# Altium PCB PROC091F_ASCII.PcbDoc (part 1 of 7)
Units mil, origin at the board's own origin, x right, y up, seen from the top; angles counter-clockwise.
Board outline 3590.95 x 906.17 mil, 8 copper layers (Top Layer, GND1, Sig1, PWR1, PWR2, Sig2, GND2, Bottom Layer), stack 63.146 mil thick; 420 components, 316 nets, 1432 pads, 774 vias.
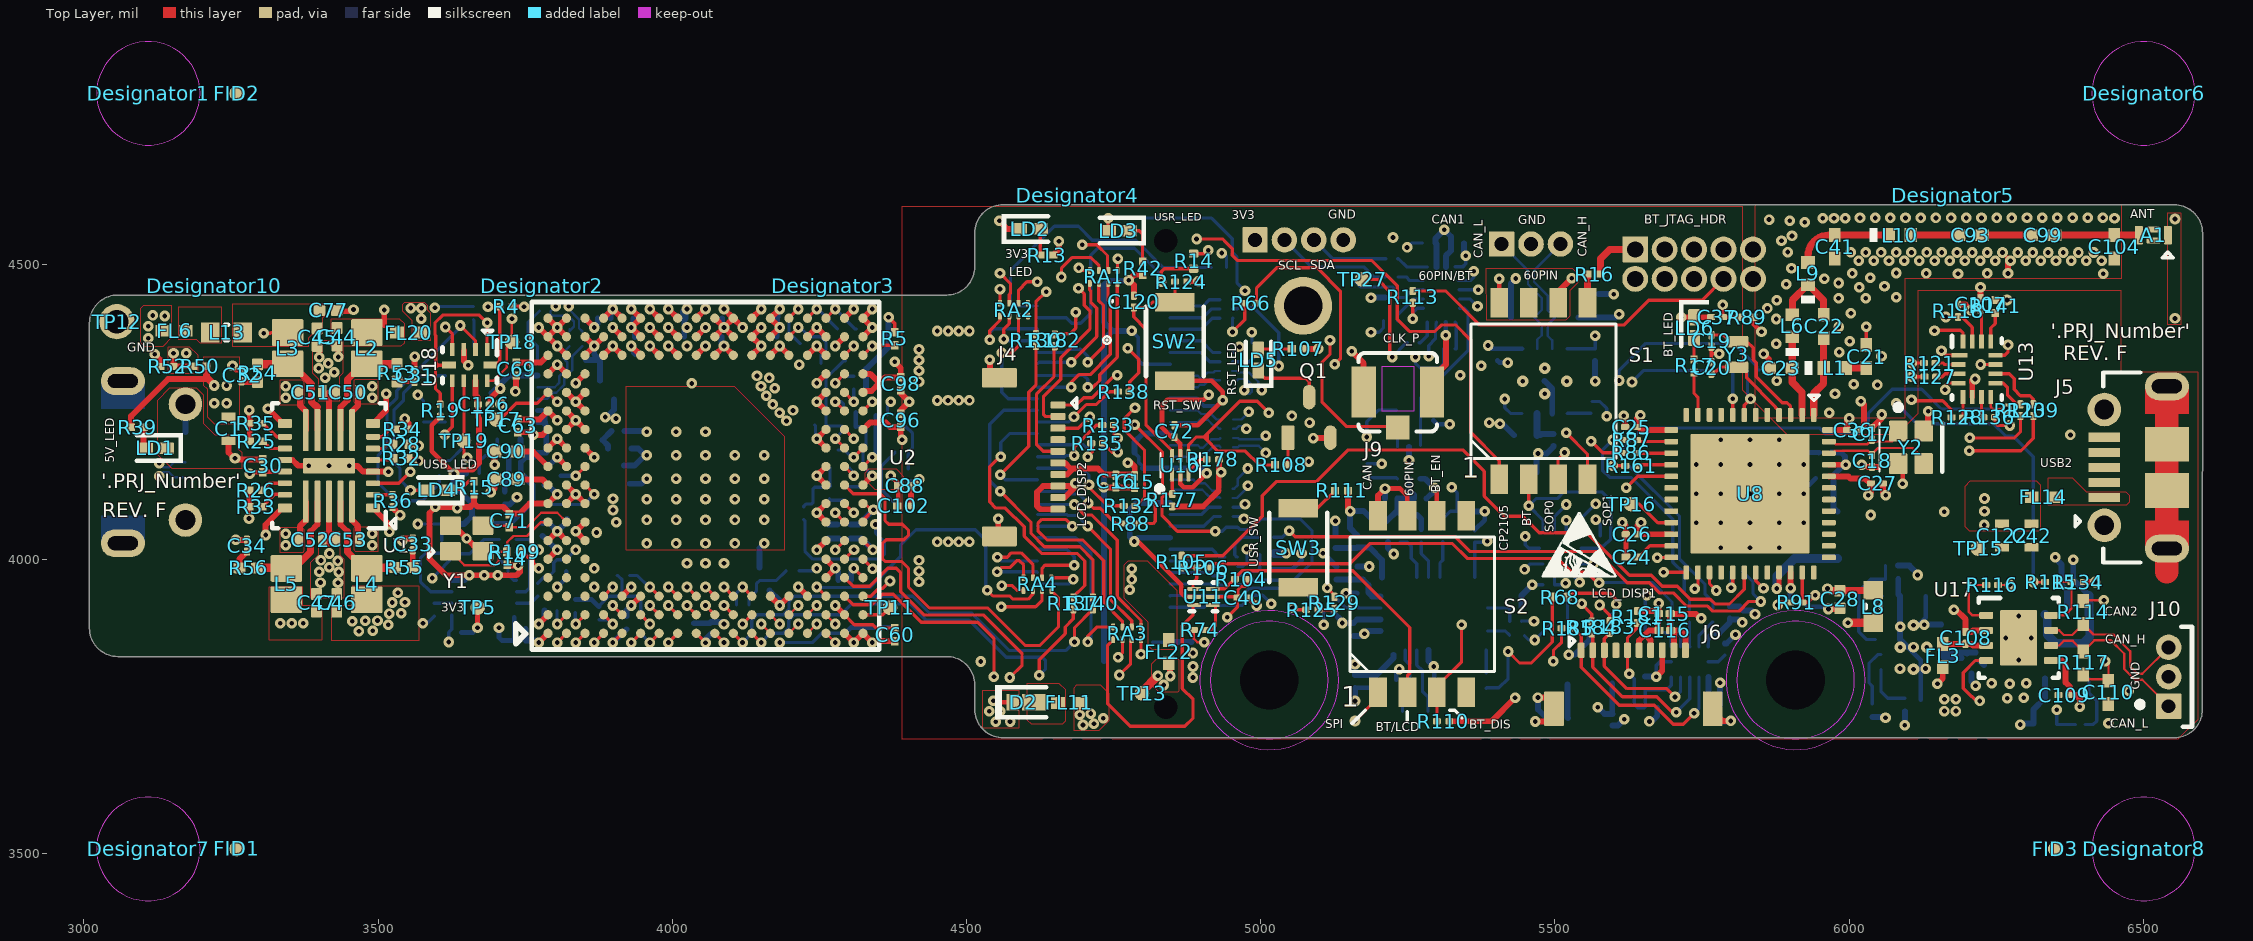
[diagram p0: Top Layer view]
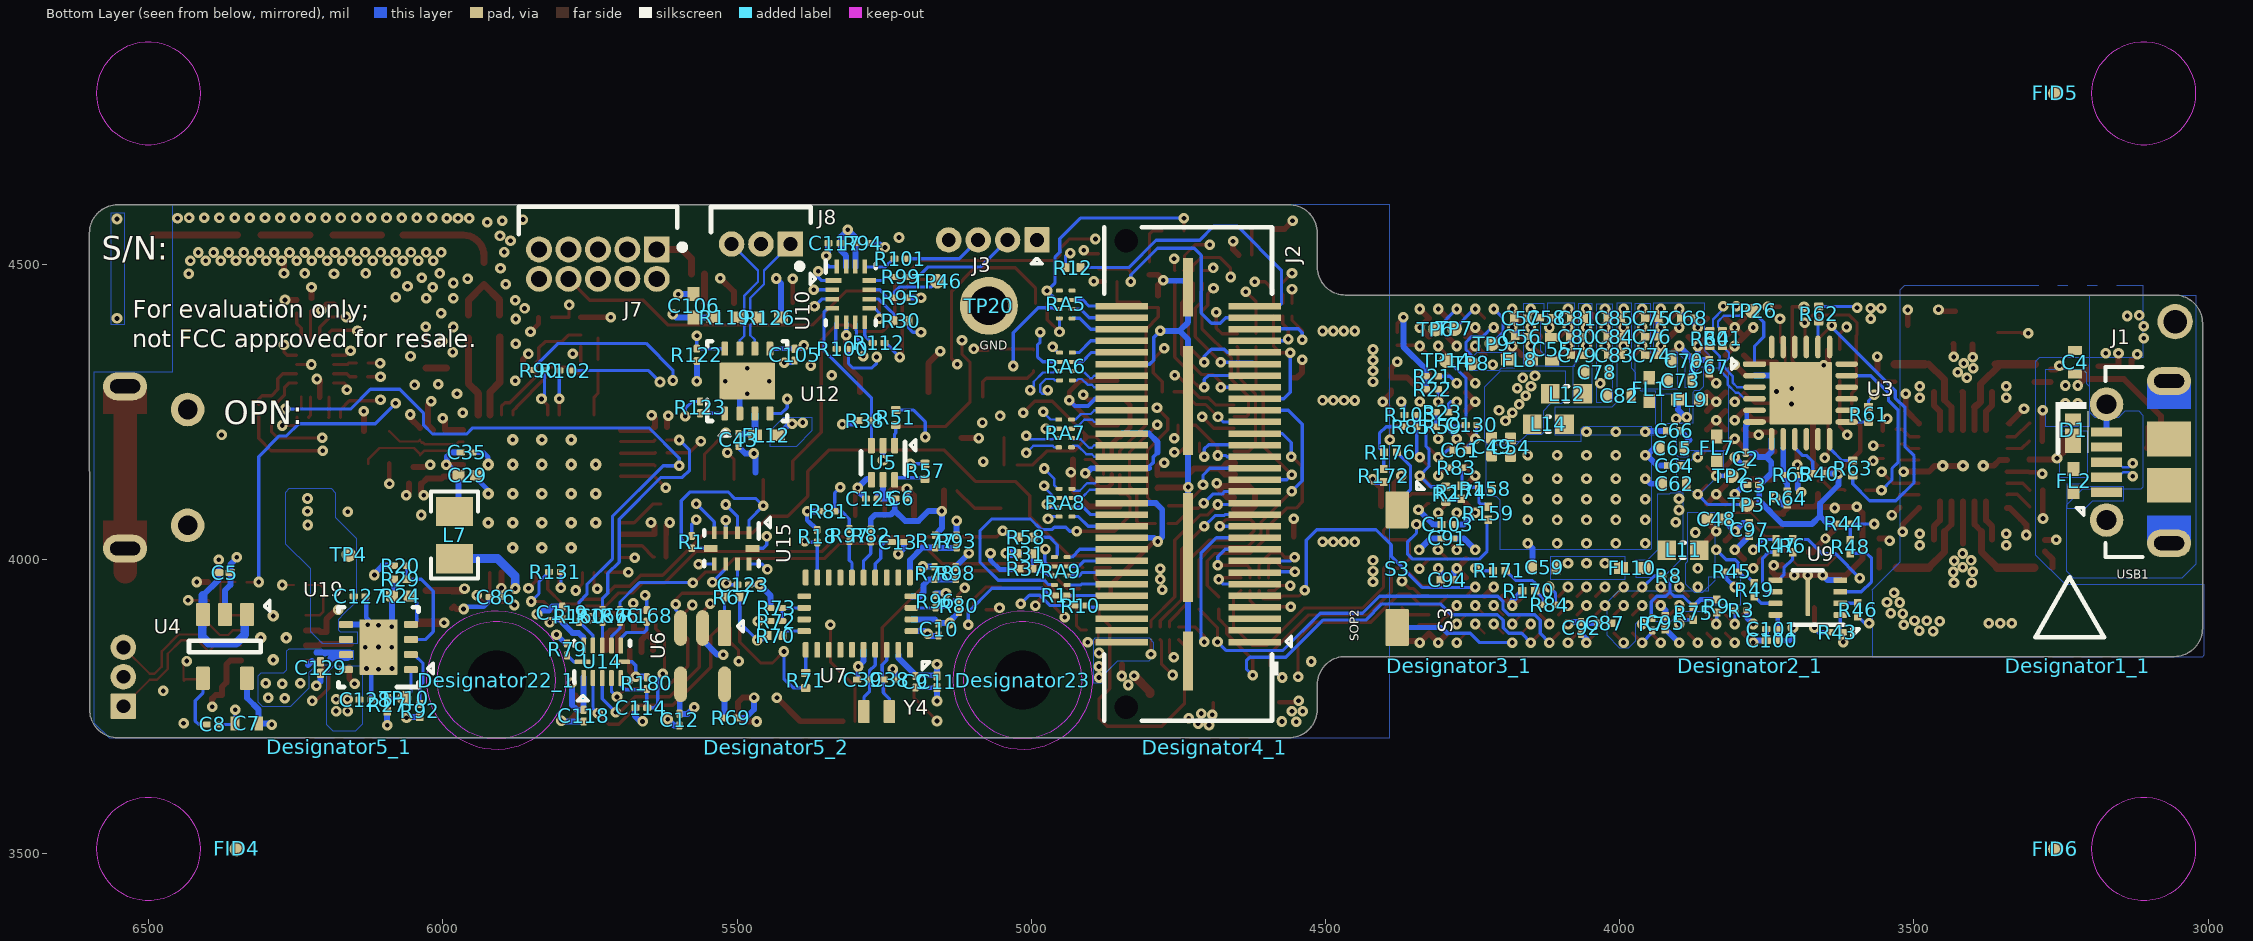
[diagram p1: Bottom Layer view, seen from below]
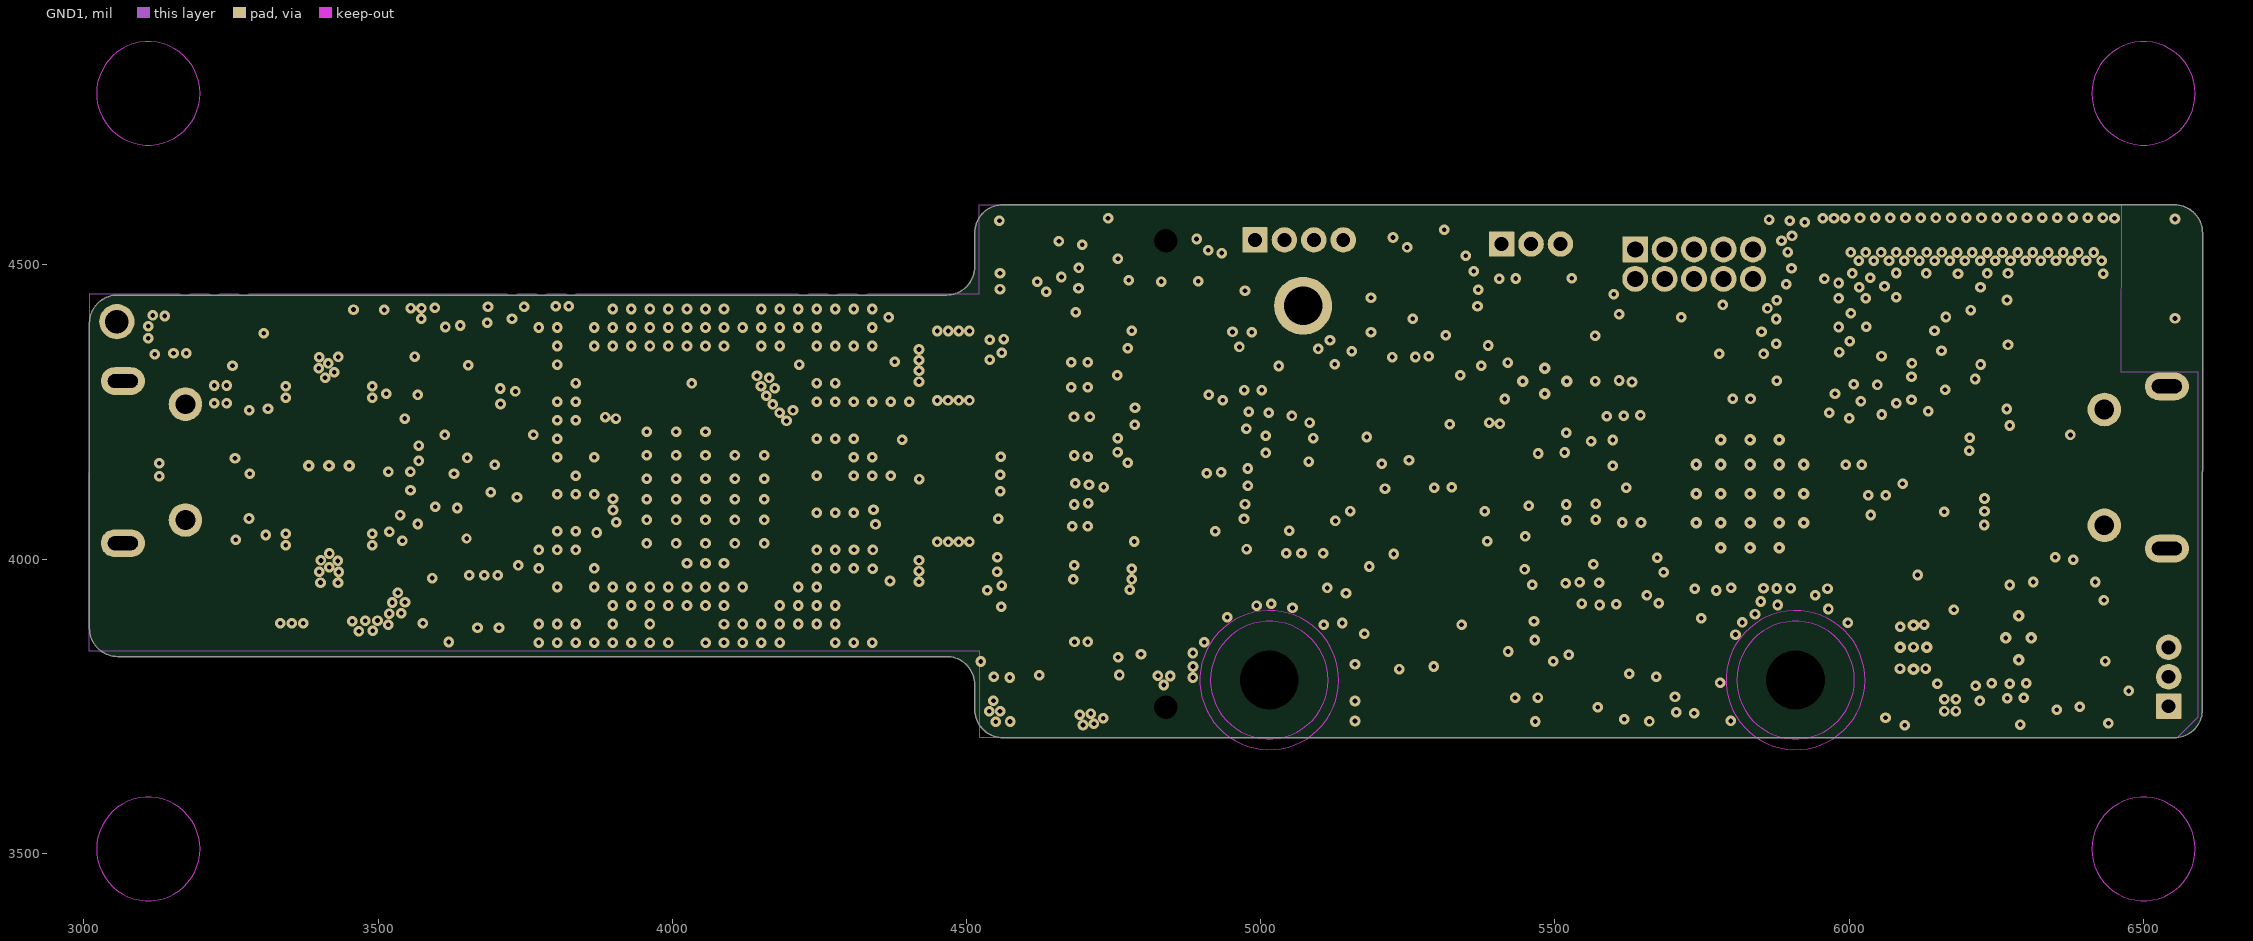
[diagram p2: GND1]
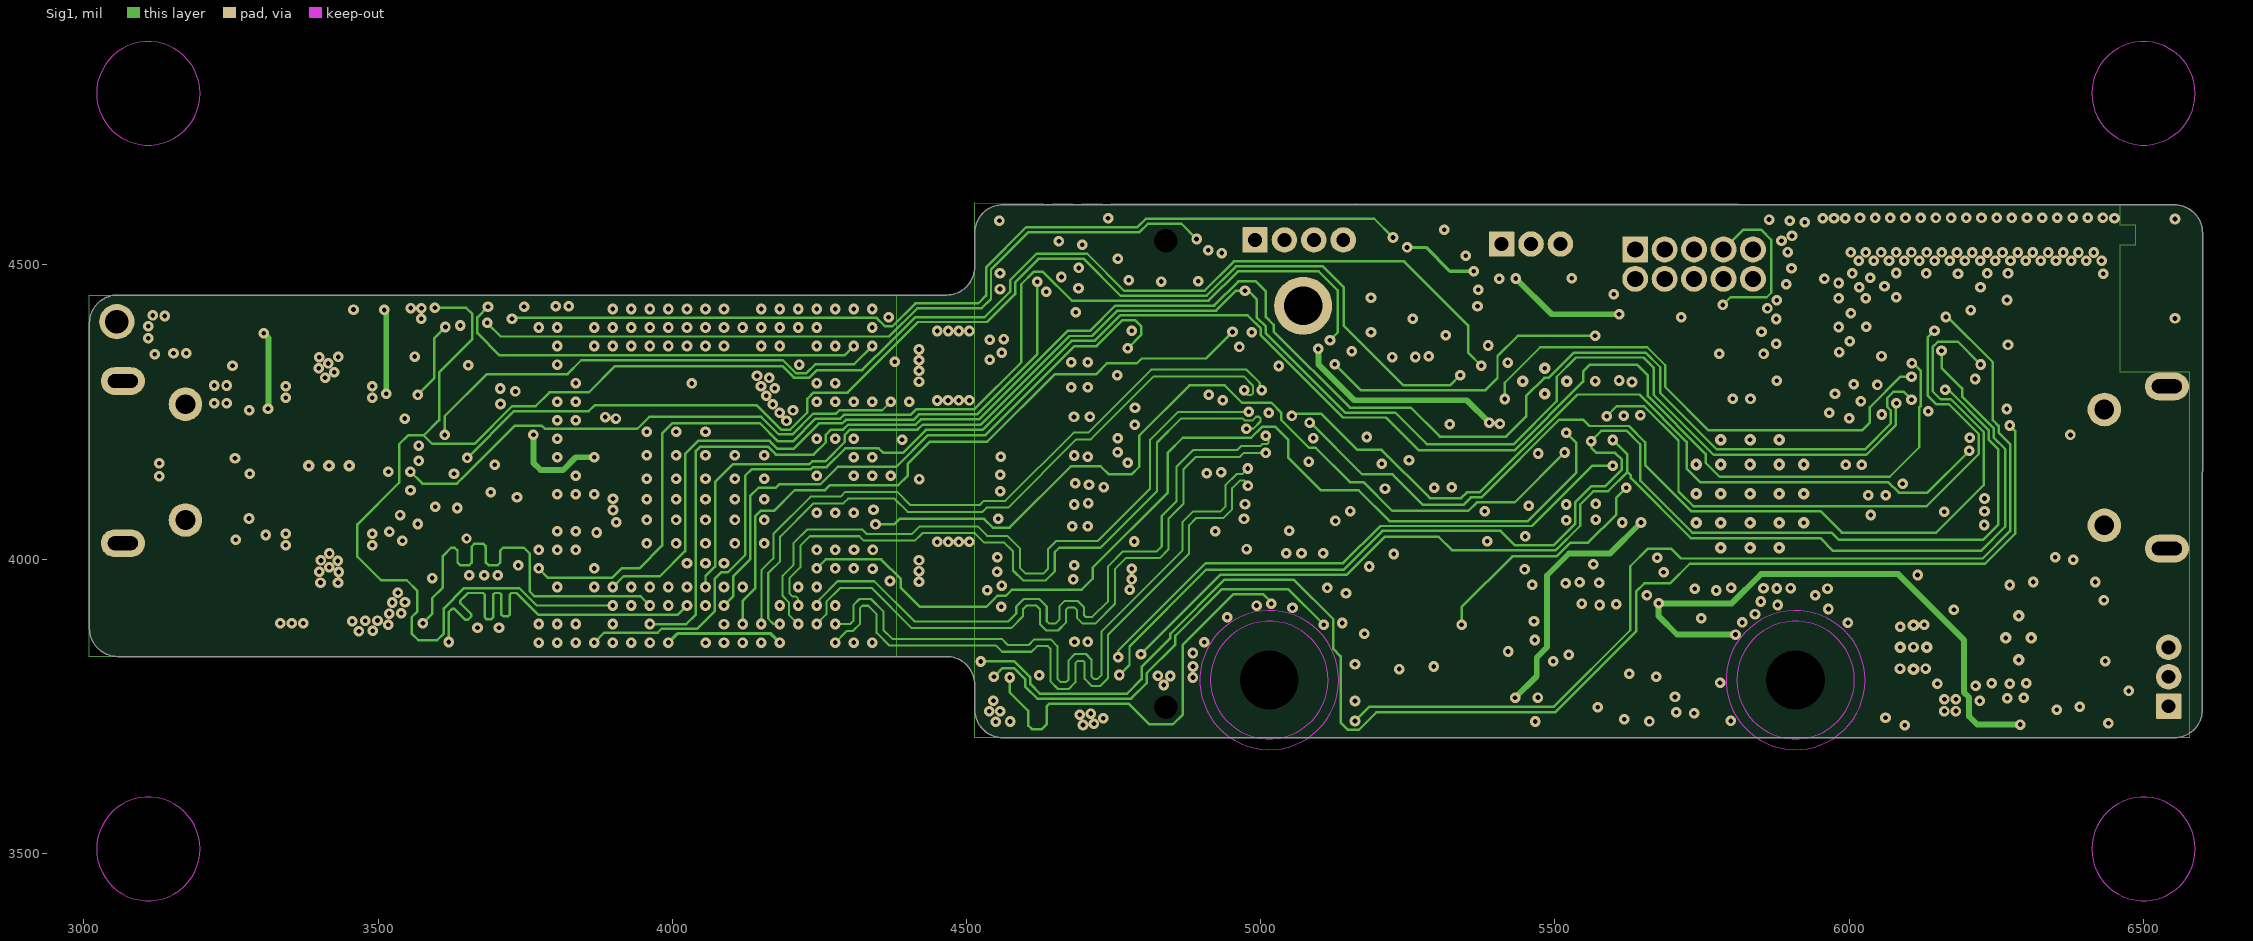
[diagram p3: Sig1]
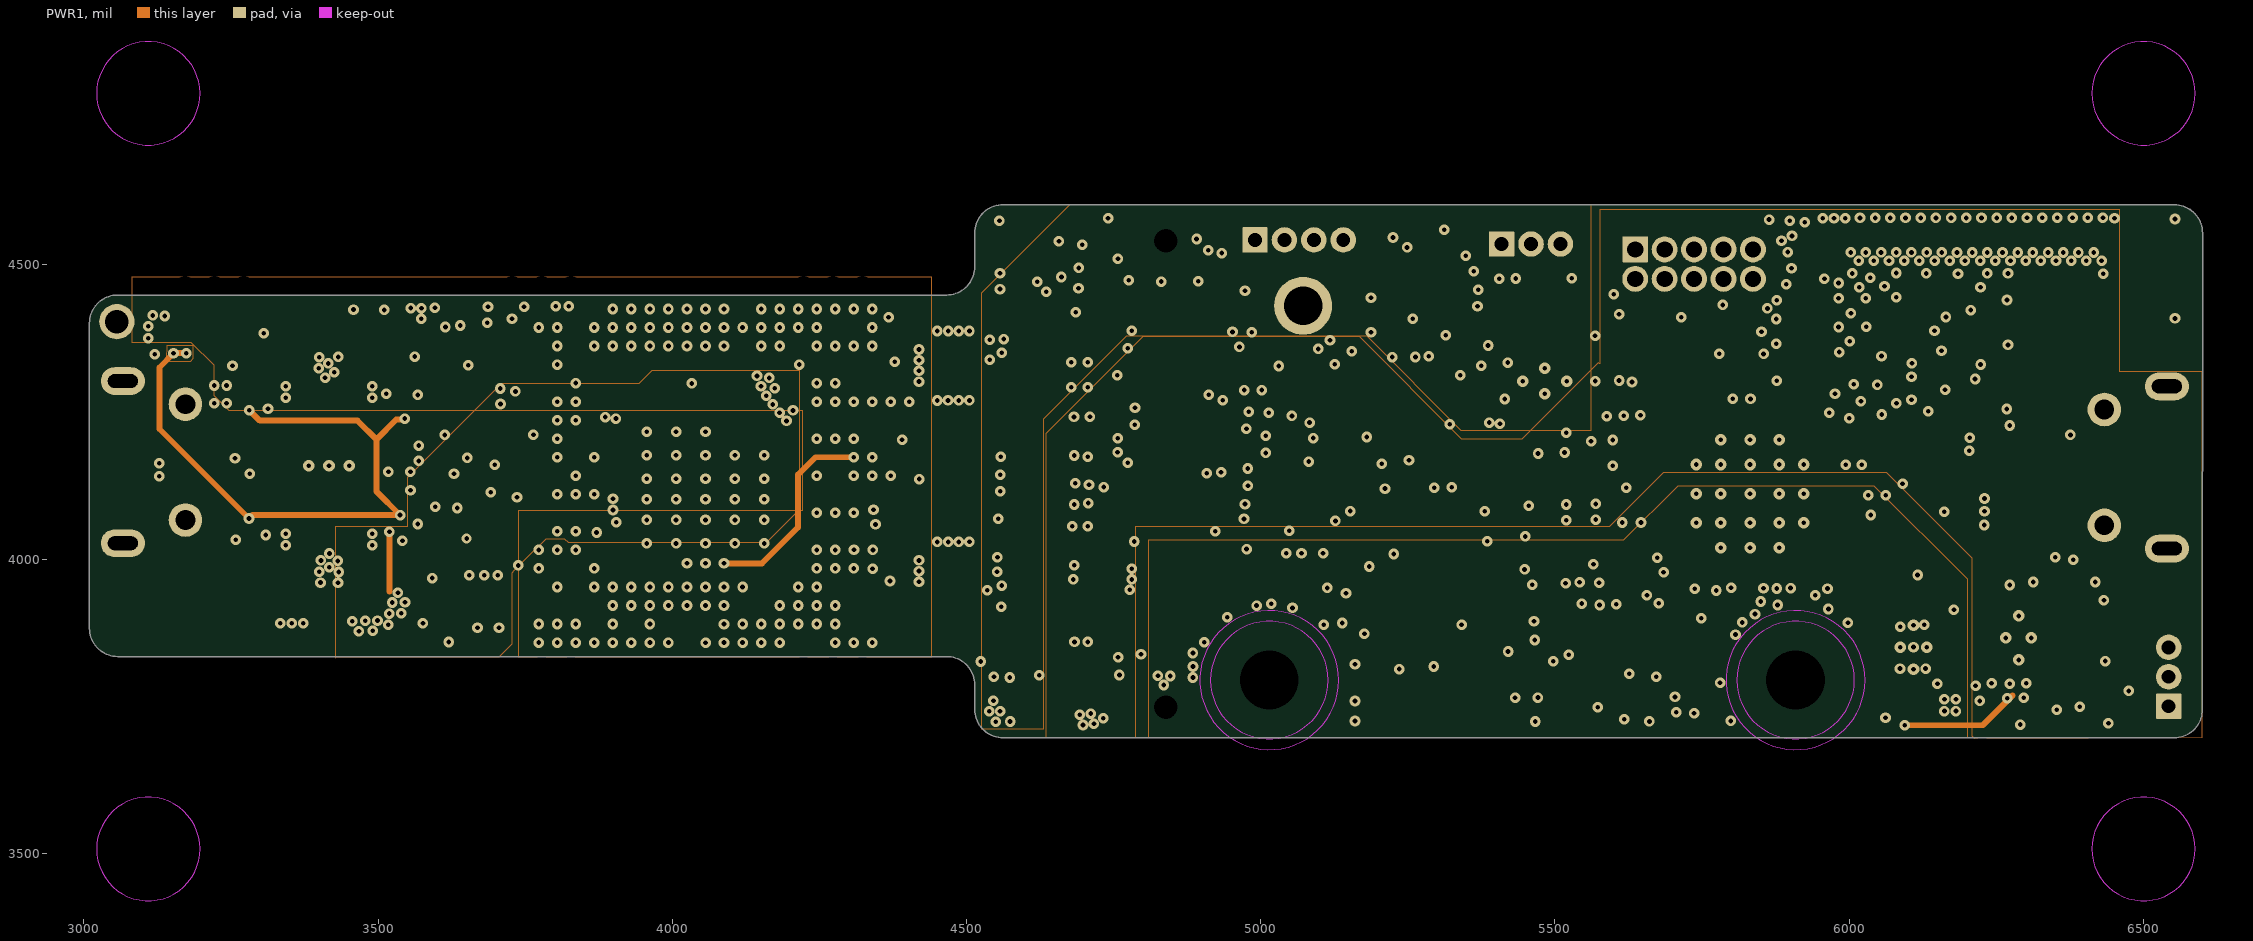
[diagram p4: PWR1]
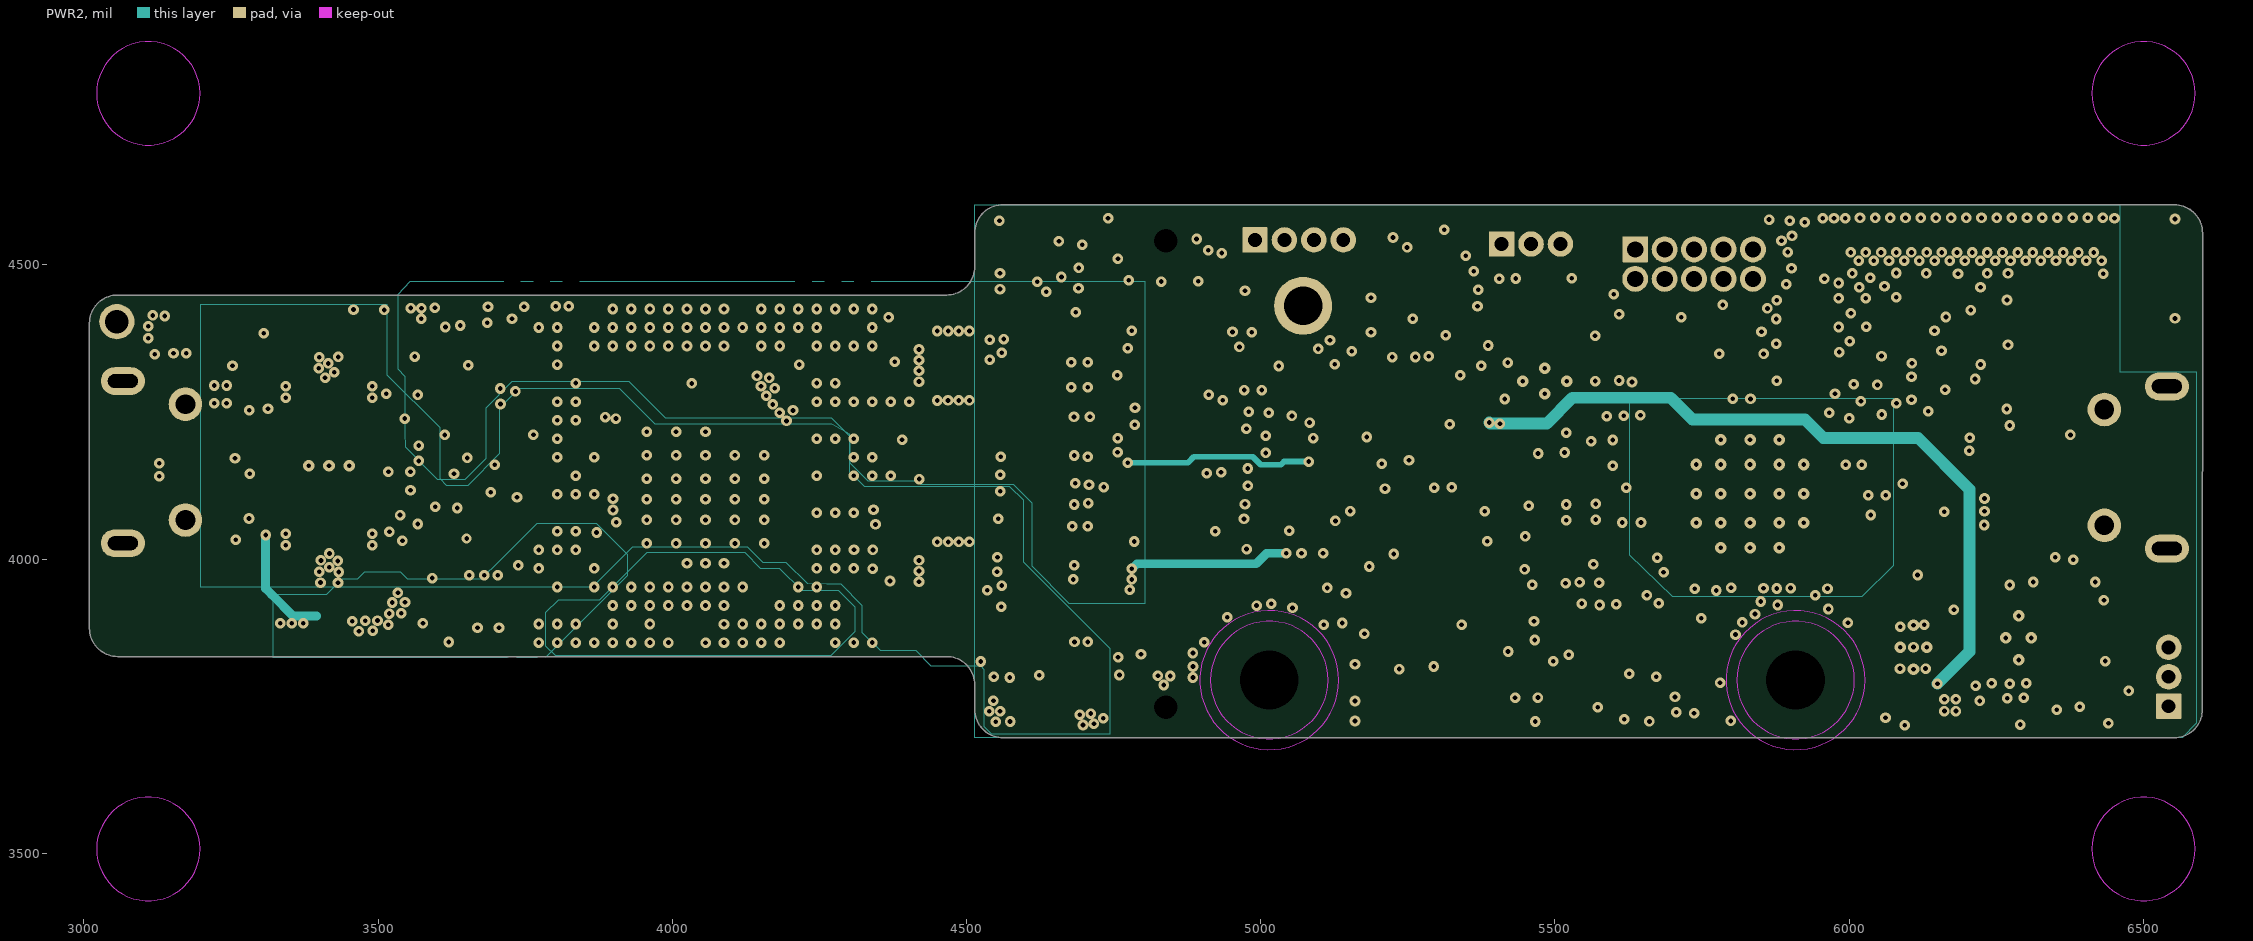
[diagram p5: PWR2]
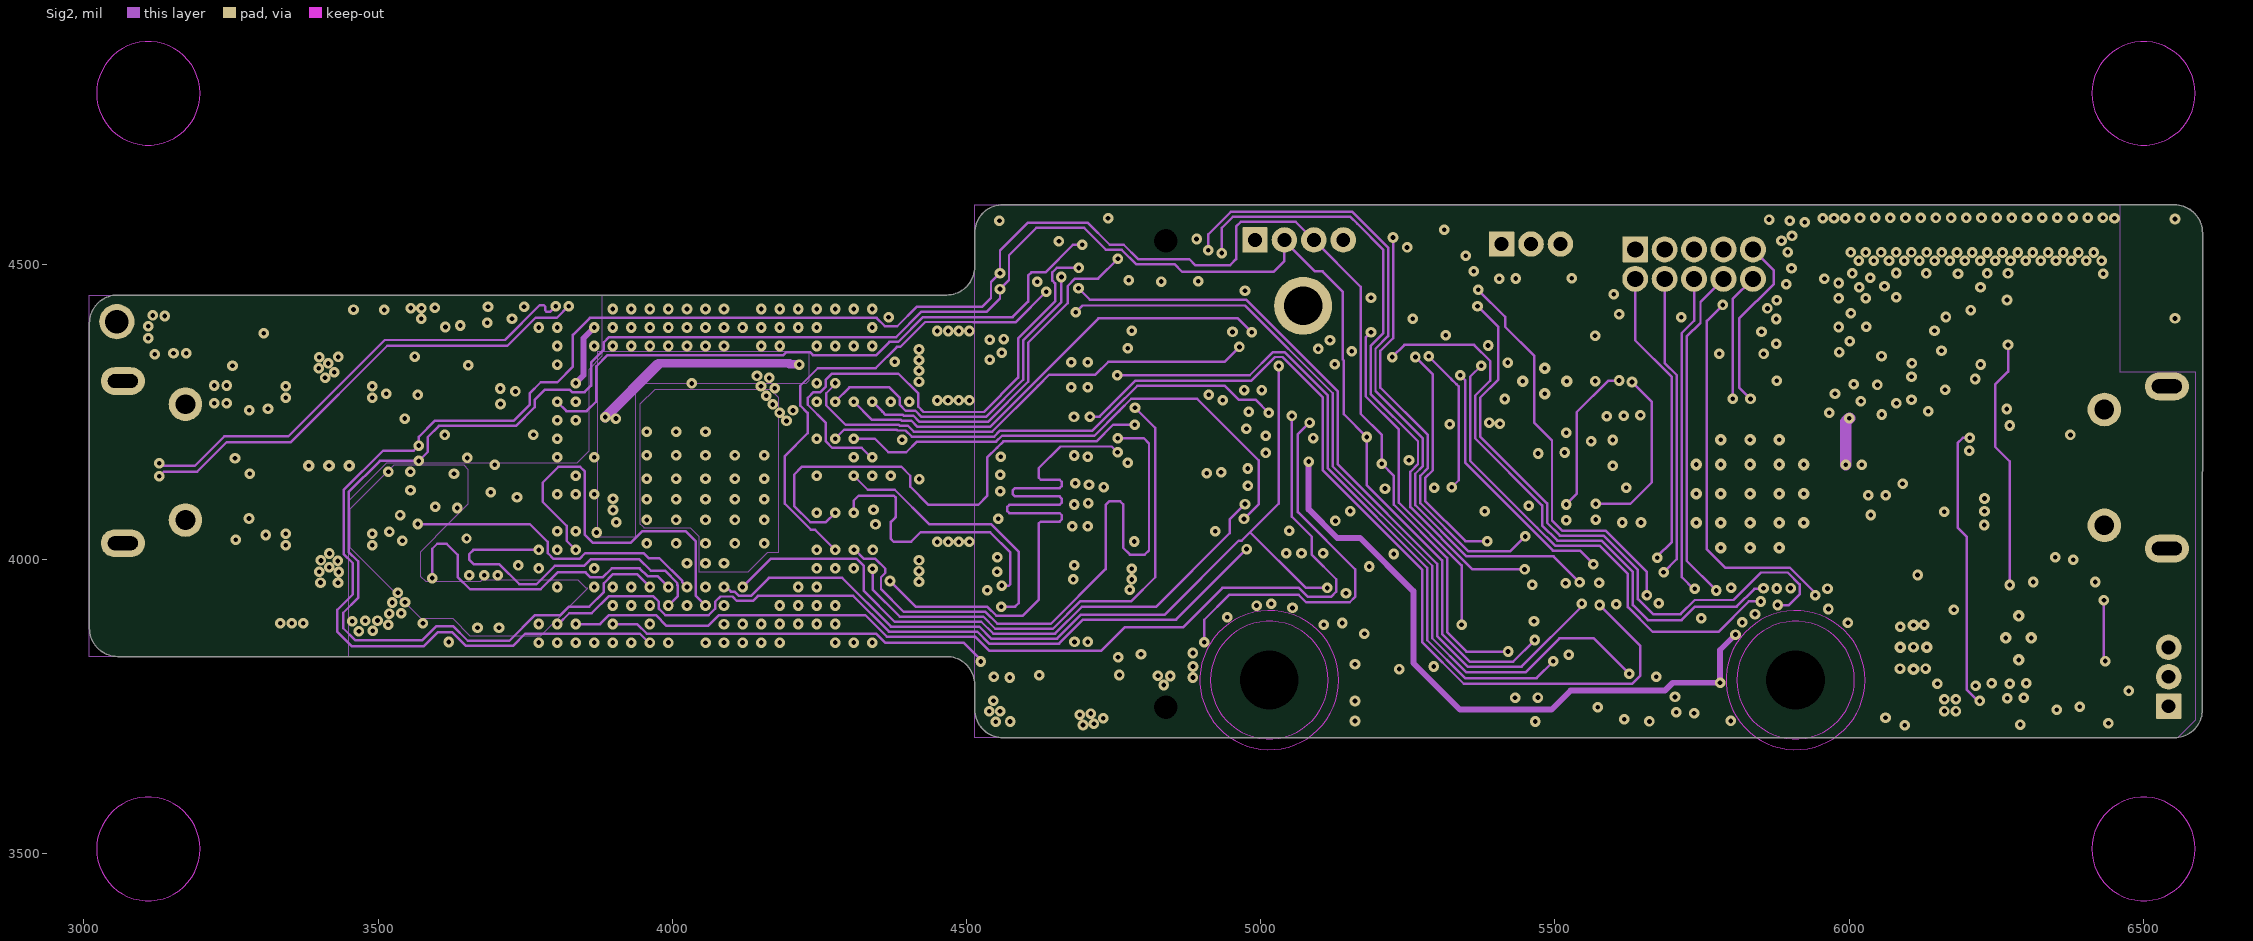
[diagram p6: Sig2]
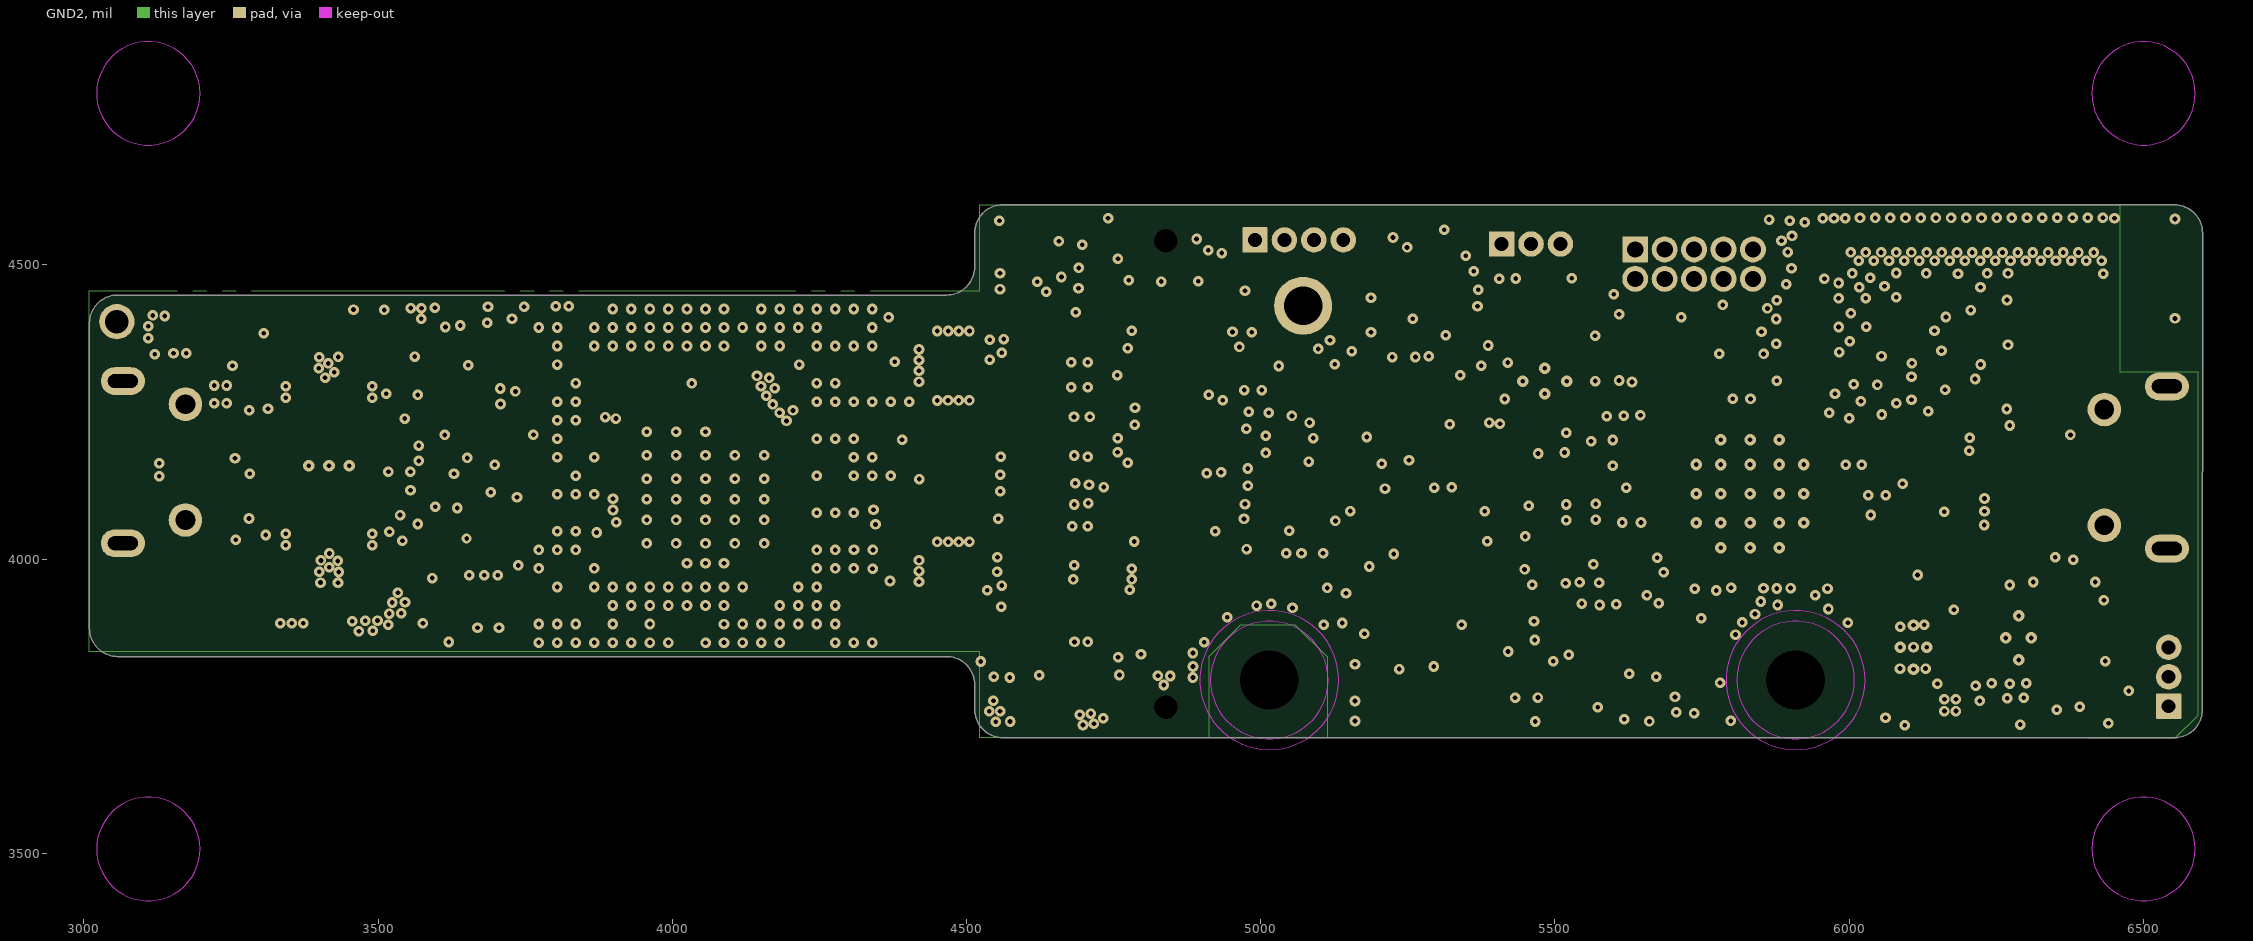
[diagram p7: GND2]

## Layer stack, top to bottom
Top Solder: solder mask 0.5, Solder Resist, Dk 3.5
Top Layer: signal copper 1.373
Dielectric1: core 3.7, FR-4 High Tg, Dk 4.2
GND1: signal copper 2.4
Dielectric3: dielectric 4.5, FR-4 High Tg, Dk 4.2
Sig1: signal copper 1.2
Dielectric2: dielectric 12, FR-4 High Tg, Dk 4.2
PWR1: signal copper 2.4
Dielectric4: dielectric 8, FR-4 High Tg, Dk 4.2
PWR2: signal copper 2.4
Dielectric5: dielectric 12, FR-4 High Tg, Dk 4.2
Sig2: signal copper 1.2
Dielectric8: dielectric 4.5, FR-4 High Tg, Dk 4.2
GND2: signal copper 2.4
Dielectric9: dielectric 3.7, FR-4 High Tg, Dk 4.2
Bottom Layer: signal copper 1.373
Bottom Solder: solder mask 0.5, Solder Resist, Dk 3.5

## Board outline
3057.58,3834.46 4466.14,3834.46 cw(c4466.14,3786.46) 4514.14,3786.46 4514.14,3744.46 ccw(c4562.14,3744.46) 4562.14,3696.46 4562.14,3696.51 6552.27,3696.2 ccw(c6552.27,3744.2) 6600.27,3744.2 6600.29,3744.2 6600.53,4554.1 ccw(c6552.53,4554.1) 6552.53,4602.1 6552.53,4602.08 4562.15,4602.33 4562.15,4602.37 ccw(c4562.15,4554.37) 4514.15,4554.37 4514.15,4496.76 cw(c4466.15,4496.76) 4466.15,4448.76 3057.58,4448.76 ccw(c3057.58,4400.76) 3009.58,4400.76 3009.58,3882.46 ccw(c3057.58,3882.46)

## Design rules (kind name [scope] priority, off if disabled: settings)
AcuteAngle [All] p0: scope1count=1 scope1_0_kind=Board scope1_0_value=Board scope2count=1 scope2_0_kind=Board scope2_0_value=Board commentlength=0 minimum=4.50000000000000E+0001
AcuteAngle [All] p1: minimum=4.50000000000000E+0001 checktracksonly=TRUE
AssemblyTestPointUsage [All] p0: scope1count=1 scope1_0_kind=Board scope1_0_value=Board scope2count=1 scope2_0_kind=Board scope2_0_value=Board commentlength=0
AssemblyTestPointUsage [All] p1: valid=2
AssemblyTestpoint [All] p0: scope1count=1 scope1_0_kind=Board scope1_0_value=Board scope2count=1 scope2_0_kind=Board scope2_0_value=Board commentlength=0
BoardOutlineClearance [All] p0 off: scope1count=1 scope1_0_kind=Board scope1_0_value=Board scope2count=1 scope2_0_kind=Board scope2_0_value=Board commentlength=81 gap=12 // Protel DXP Scope 1 Expression Was: NOT(OnTopSilkscreen OR OnBottomSilkscreen)
BoardOutlineClearance BoardOutlineClearance_1 [All] p0: scope1count=1 scope1_0_kind=Net scope1_0_value=GND scope2count=1 scope2_0_kind=Board scope2_0_value=Board commentlength=0 gap=8
BoardOutlineClearance BoardOutlineClearance_1 [InNet('GND')] p1: gap=8 ignorepadtopadclearanceinfootprint=FALSE
BoardOutlineClearance [NOT(OnTopSilkscreen OR OnBottomSilkscreen)] p2: gap=12 ignorepadtopadclearanceinfootprint=FALSE except(0: Text-OutlineEdge)
Clearance INNERlayer [All] p0 off: scope1count=1 scope1_0_kind=Board scope1_0_value=Board scope2count=1 scope2_0_kind=Board scope2_0_value=Board commentlength=75 gap=8 // Protel DXP Scope 1 Expression Was: (OnLayer('pwr1') or OnLayer('pwr2'))
Clearance "SAME NET" [All] p0: scope1count=1 scope1_0_kind=Board scope1_0_value=Board scope2count=1 scope2_0_kind=Board scope2_0_value=Board commentlength=0 gap=0
Clearance [All] p0: scope1count=1 scope1_0_kind=Board scope1_0_value=Board scope2count=1 scope2_0_kind=Board scope2_0_value=Board commentlength=0 gap=1
Clearance 50E_INNERlayer [All] p0 off: scope1count=1 scope1_0_kind=Board scope1_0_value=Board scope2count=1 scope2_0_kind=Board scope2_0_value=Board commentlength=75 gap=4.2 // Protel DXP Scope 1 Expression Was: (OnLayer('sig1') or OnLayer('Sig2'))
Clearance 100E [All] p0 off: scope1count=1 scope1_0_kind=Board scope1_0_value=Board scope2count=1 scope2_0_kind=Board scope2_0_value=Board commentlength=70 gap=8 // Protel DXP Scope 1 Expression Was: InDifferentialPairClass('100E')
Clearance AOP_Sig [All] p0 off: scope1count=1 scope1_0_kind=Board scope1_0_value=Board scope2count=1 scope2_0_kind=Board scope2_0_value=Board commentlength=97 gap=4 // Protel DXP Scope 1 Expression Was: WithinRoom('BGA') AND (OnLayer('sig1') or OnLayer('sig2'))
Clearance AOP_T-B [All] p0 off: scope1count=1 scope1_0_kind=Board scope1_0_value=Board scope2count=1 scope2_0_kind=Board scope2_0_value=Board commentlength=48 gap=4 // Protel DXP Scope 2 Expression Was: OnOutside
Clearance 90E_OUTSIDE [All] p0 off: scope1count=1 scope1_0_kind=Board scope1_0_value=Board scope2count=1 scope2_0_kind=Board scope2_0_value=Board commentlength=48 gap=6 // Protel DXP Scope 2 Expression Was: OnOutside
Clearance RF_TRACE [All] p0: scope1count=1 scope1_0_kind=NetClass scope1_0_value=RF scope2count=1 scope2_0_kind=Board scope2_0_value=Board commentlength=0 gap=4
Clearance Keepout [All] p0 off: scope1count=1 scope1_0_kind=Board scope1_0_value=Board scope2count=1 scope2_0_kind=Board scope2_0_value=Board commentlength=66 gap=0.01 // Protel DXP Scope 1 Expression Was: (OnLayer('Keep-Out Layer'))
Clearance Keepout [(OnLayer('Keep-Out Layer'))] p1: gap=0.01 ignorepadtopadclearanceinfootprint=FALSE except(5.9: THPad-THPad; 7: Arc-THPad Track-THPad THPad-Via; 8: THPad-Fill THPad-Poly THPad-Region)
Clearance RF_TRACE [InNetClass('RF')] p2: gap=4 ignorepadtopadclearanceinfootprint=FALSE except(0: Arc-Hole Track-Hole SMDPad-Hole THPad-Hole Via-Hole Fill-Hole Poly-Hole Region-Hole Text-Hole; 2: Arc-Text Track-Text SMDPad-Text THPad-Text Via-Text Fill-Text Poly-Text Region-Text Text-Text; 5.9: THPad-THPad; 6: SMDPad-Fill SMDPad-Poly SMDPad-Region Via-Fill Via-Poly Via-Region; 7: Arc-THPad Track-THPad THPad-Via; 8: THPad-Fill THPad-Poly THPad-Region; 10: Arc-Fill Arc-Poly Arc-Region Track-Fill Track-Poly Track-Region; 15: Fill-Fill Fill-Poly Fill-Region Poly-Poly Poly-Region Region-Region)
Clearance AOP_T-B [WithinRoom('BGA') vs OnOutside] p3: gap=4 ignorepadtopadclearanceinfootprint=TRUE except(0: Arc-Hole Track-Hole SMDPad-Hole THPad-Hole Via-Hole Fill-Hole Poly-Hole Region-Hole Text-Hole; 3.8: SMDPad-Via; 3.9: Arc-Via Track-Via; 5.9: THPad-THPad; 7: Arc-THPad Track-THPad THPad-Via; 8: THPad-Fill THPad-Poly THPad-Region Fill-Fill Fill-Poly Fill-Region Poly-Poly Poly-Region Region-Region)
Clearance AOP_Sig [WithinRoom('BGA') AND (OnLayer('sig1') or OnLayer('sig2'))] p4: gap=4 ignorepadtopadclearanceinfootprint=FALSE except(0: Arc-Hole Track-Hole SMDPad-Hole THPad-Hole Via-Hole Fill-Hole Poly-Hole Region-Hole Text-Hole; 3.5: Arc-Arc Arc-Track Arc-Via Arc-Text Track-Track Track-Via Track-Text SMDPad-Text THPad-Text Via-Via Via-Text Fill-Text Poly-Text Region-Text Text-Text; 3.8: SMDPad-Via; 5.9: THPad-THPad; 7: Arc-THPad Track-THPad THPad-Via; 8: SMDPad-THPad THPad-Fill THPad-Poly THPad-Region; 15: Fill-Fill Fill-Poly Fill-Region Poly-Poly Poly-Region Region-Region)
Clearance 50E_INNERlayer [(OnLayer('sig1') or OnLayer('Sig2'))] p5: gap=4.2 ignorepadtopadclearanceinfootprint=TRUE except(0: Arc-Hole Track-Hole SMDPad-Hole THPad-Hole Via-Hole Fill-Hole Poly-Hole Region-Hole Text-Hole; 2: SMDPad-Text Fill-Text Poly-Text Region-Text Text-Text; 5.9: THPad-THPad; 6: SMDPad-Fill SMDPad-Poly SMDPad-Region; 7: Arc-THPad Track-THPad THPad-Via; 8: Arc-Fill Arc-Poly Arc-Region Track-Fill Track-Poly Track-Region THPad-Fill THPad-Poly THPad-Region; 12: Fill-Fill Fill-Poly Fill-Region Poly-Poly Poly-Region Region-Region)
Clearance INNERlayer [(OnLayer('pwr1') or OnLayer('pwr2'))] p6: gap=8 ignorepadtopadclearanceinfootprint=TRUE except(0: Arc-Hole Track-Hole SMDPad-Hole THPad-Hole Via-Hole Fill-Hole Poly-Hole Region-Hole Text-Hole; 2: SMDPad-Text Fill-Text Poly-Text Region-Text Text-Text; 4: Via-Fill Via-Poly Via-Region; 4.2: Arc-Text Track-Text THPad-Text Via-Via Via-Text; 5: THPad-Fill THPad-Poly THPad-Region; 5.9: THPad-THPad; 6: Arc-Via Arc-Fill Arc-Poly Arc-Region Track-Via Track-Fill Track-Poly Track-Region; 7: THPad-Via; 12: Fill-Fill Fill-Poly Fill-Region Poly-Poly Poly-Region Region-Region)
Clearance 100E [InDifferentialPairClass('100E')] p7: gap=8 ignorepadtopadclearanceinfootprint=FALSE except(0: Arc-Hole Track-Hole SMDPad-Hole THPad-Hole Via-Hole Fill-Hole Poly-Hole Region-Hole Text-Hole; 2: Arc-Text Track-Text THPad-Text Via-Text Fill-Text Poly-Text Region-Text Text-Text; 4: Arc-SMDPad Track-SMDPad SMDPad-SMDPad SMDPad-THPad SMDPad-Via SMDPad-Text Via-Via Via-Fill Via-Poly Via-Region; 5: Arc-Via Track-Via; 5.9: THPad-THPad; 6: SMDPad-Fill SMDPad-Poly SMDPad-Region Fill-Fill Fill-Poly Fill-Region Poly-Poly Poly-Region Region-Region; 7: Arc-THPad Track-THPad THPad-Via)
Clearance 90E_OUTSIDE [InDifferentialPairClass('90E') vs OnOutside] p8: gap=6 ignorepadtopadclearanceinfootprint=TRUE except(0: Arc-Hole Track-Hole SMDPad-Hole THPad-Hole Via-Hole Fill-Fill Fill-Poly Fill-Region Fill-Hole Poly-Poly Poly-Region Poly-Hole Region-Region Region-Hole Text-Hole; 2: Arc-Text Track-Text SMDPad-Text THPad-Text Via-Text Fill-Text Poly-Text Region-Text Text-Text; 3.8: SMDPad-Via; 4: Arc-SMDPad Track-SMDPad SMDPad-SMDPad Via-Via Via-Fill Via-Poly Via-Region; 4.5: Arc-Arc Arc-Track Arc-Via Track-Track Track-Via; 5.9: THPad-THPad; 7: Arc-THPad Track-THPad SMDPad-THPad THPad-Via; 8: THPad-Fill THPad-Poly THPad-Region)
Clearance [All] p9: gap=1 ignorepadtopadclearanceinfootprint=TRUE except(0: Arc-Hole Track-Hole SMDPad-Hole THPad-Hole Via-Hole Fill-Hole Poly-Hole Region-Hole Text-Hole; 4: SMDPad-SMDPad SMDPad-Via Via-Via Via-Fill Via-Poly Via-Region; 5: Arc-SMDPad Arc-Fill Arc-Poly Arc-Region Track-SMDPad Track-Fill Track-Poly Track-Region; 5.9: THPad-THPad; 6: Arc-Arc Arc-Track Arc-Via Track-Track Track-Via SMDPad-Fill SMDPad-Poly SMDPad-Region; 7: Arc-THPad Track-THPad SMDPad-THPad THPad-Via; 8: THPad-Fill THPad-Poly THPad-Region; 12: Fill-Fill Fill-Poly Fill-Region Poly-Poly Poly-Region Region-Region)
Clearance "SAME NET" [All] p10: gap=0 ignorepadtopadclearanceinfootprint=FALSE except(0.5: SMDPad-Text; 5.9: THPad-THPad)
ComponentClearance ComponentClearance_THtoTH [All] p0 off: scope1count=1 scope1_0_kind=Board scope1_0_value=Board scope2count=1 scope2_0_kind=Board scope2_0_value=Board commentlength=54 gap=20 collisioncheckmode=3 // Protel DXP Scope 2 Expression Was: IsThruComponent
ComponentClearance ComponentClearance_THtoSMT [All] p0 off: scope1count=1 scope1_0_kind=Board scope1_0_value=Board scope2count=1 scope2_0_kind=Board scope2_0_value=Board commentlength=53 gap=5 collisioncheckmode=3 // Protel DXP Scope 2 Expression Was: IsSMTComponent
ComponentClearance ComponentClearance_SmallPassives [All] p0 off: scope1count=1 scope1_0_kind=Board scope1_0_value=Board scope2count=1 scope2_0_kind=Board scope2_0_value=Board commentlength=508 gap=10 collisioncheckmode=3 // Protel DXP Scope 2 Expression Was: HasFootprint('0201*') or HasFootprint('0402*') or HasFootprint('0508') or HasFootprint('0603*') or HasFootprint('0612') or HasFootprint('0805*') or HasFootprint('0815*') or HasFootprint('0830*') or HasFootprint('1206*') or HasFootprint('1210*') or HasFootprint('1808*') or HasFootprint('1812*') or HasFootprint('1825*') or HasFootprint('2010*') or HasFootprint('2220*') or HasFootprint('2225*') or HasFootprint('2512*') or HasFootprint('2728*') or HasFootprint('3518*')
ComponentClearance ComponentClearance_MountingHoles [All] p0: scope1count=1 scope1_0_kind=ComponentClass scope1_0_value="Mounting Holes" scope2count=1 scope2_0_kind=Board scope2_0_value=Board commentlength=0 gap=20 collisioncheckmode=3
ComponentClearance ComponentClearance_ScrewToNut [All] p0 off: scope1count=1 scope1_0_kind=Board scope1_0_value=Board scope2count=1 scope2_0_kind=Board scope2_0_value=Board commentlength=71 gap=5 collisioncheckmode=3 // Protel DXP Scope 2 Expression Was: (HasFootprint('Keystone_1902C'))
ComponentClearance ComponentClearance_Logo [All] p0: scope1count=1 scope1_0_kind=ComponentClass scope1_0_value=Logo scope2count=1 scope2_0_kind=Board scope2_0_value=Board commentlength=0 gap=50 collisioncheckmode=3
ComponentClearance ComponentClearance_Shunt [All] p0: scope1count=1 scope1_0_kind=ComponentClass scope1_0_value=Header scope2count=1 scope2_0_kind=ComponentClass scope2_0_value=Shunt commentlength=0 gap=1 collisioncheckmode=3
ComponentClearance ComponentClearance_MountingHoles_FiducialMarks [All] p0: scope1count=1 scope1_0_kind=ComponentClass scope1_0_value="Mounting Holes" scope2count=1 scope2_0_kind=ComponentClass scope2_0_value=FiducialMark commentlength=0 gap=50 collisioncheckmode=3
ComponentClearance [All] p0: scope1count=1 scope1_0_kind=Board scope1_0_value=Board scope2count=1 scope2_0_kind=Board scope2_0_value=Board commentlength=0 gap=1 collisioncheckmode=3
ComponentClearance ComponentClearance_R188_204 [All] p0: scope1count=1 scope1_0_kind=Component scope1_0_value=R188 scope2count=1 scope2_0_kind=Component scope2_0_value=R204 commentlength=0 gap=-1 collisioncheckmode=3
ComponentClearance ComponentClearance_R199_187 [All] p0: scope1count=1 scope1_0_kind=Component scope1_0_value=R199 scope2count=1 scope2_0_kind=Component scope2_0_value=R187 commentlength=0 gap=-1 collisioncheckmode=3
ComponentClearance ComponentClearance_R199_187 [InComponent('R199') vs InComponent('R187')] p1: gap=-1 collisioncheckmode=3 verticalgap=10 showdistances=FALSE
ComponentClearance ComponentClearance_R188_204 [InComponent('R188') vs InComponent('R204')] p2: gap=-1 collisioncheckmode=3 verticalgap=10 showdistances=FALSE
ComponentClearance [All] p3: gap=1 collisioncheckmode=3 verticalgap=10 showdistances=FALSE
ComponentClearance ComponentClearance_MountingHoles_FiducialMarks [InComponentClass('Mounting Holes') vs InComponentClass('FiducialMark')] p4: gap=50 collisioncheckmode=3 verticalgap=10 showdistances=FALSE
ComponentClearance ComponentClearance_Shunt [InComponentClass('Header') vs InComponentClass('Shunt')] p5: gap=1 collisioncheckmode=3 verticalgap=0 showdistances=FALSE
ComponentClearance ComponentClearance_Logo [InComponentClass('Logo')] p6: gap=50 collisioncheckmode=3 verticalgap=10 showdistances=FALSE
ComponentClearance ComponentClearance_ScrewToNut [(HasFootprint('NY PMS 440 0025 PH')) vs (HasFootprint('Keystone_1902C'))] p7: gap=5 collisioncheckmode=3 verticalgap=10 showdistances=FALSE
ComponentClearance ComponentClearance_MountingHoles [InComponentClass('Mounting Holes')] p8: gap=20 collisioncheckmode=3 verticalgap=100000 showdistances=FALSE
ComponentClearance ComponentClearance_SmallPassives [HasFootprint('0201*') or HasFootprint('0402*') or HasFootprint('0508') or HasFootprint('0603*') or HasFootprint('0612') or HasFootprint('0805*') or HasFootprint('0815*') or HasFootprint('0830*') or HasFootprint('1206*') or HasFootprint('1210*') or HasFootprint('1808*') or HasFootprint('1812*') or HasFootprint('1825*') or HasFootprint('2010*') or HasFootprint('2220*') or HasFootprint('2225*') or HasFootprint('2512*') or HasFootprint('2728*') or HasFootprint('3518*') vs HasFootprint('0201*') or HasFootprint('0402*') or HasFootprint('0508') or HasFootprint('0603*') or HasFootprint('0612') or HasFootprint('0805*') or HasFootprint('0815*') or HasFootprint('0830*') or HasFootprint('1206*') or HasFootprint('1210*') or HasFootprint('1808*') or HasFootprint('1812*') or HasFootprint('1825*') or HasFootprint('2010*') or HasFootprint('2220*') or HasFootprint('2225*') or HasFootprint('2512*') or HasFootprint('2728*') or HasFootprint('3518*')] p9: gap=10 collisioncheckmode=3 verticalgap=10 showdistances=FALSE
ComponentClearance ComponentClearance_THtoSMT [IsThruComponent vs IsSMTComponent] p10: gap=5 collisioncheckmode=3 verticalgap=20 showdistances=FALSE
ComponentClearance ComponentClearance_THtoTH [IsThruComponent vs IsThruComponent] p11: gap=20 collisioncheckmode=3 verticalgap=30 showdistances=FALSE
DiffPairsRouting Diff_120E [All] p0: scope1count=1 scope1_0_kind=Board scope1_0_value=Board scope2count=1 scope2_0_kind=Board scope2_0_value=Board commentlength=0
DiffPairsRouting Diff_100E [All] p0 off: scope1count=1 scope1_0_kind=Board scope1_0_value=Board scope2count=1 scope2_0_kind=Board scope2_0_value=Board commentlength=70 // Protel DXP Scope 1 Expression Was: InDifferentialPairClass('100E')
DiffPairsRouting Diff_90E [All] p0 off: scope1count=1 scope1_0_kind=Board scope1_0_value=Board scope2count=1 scope2_0_kind=Board scope2_0_value=Board commentlength=69 // Protel DXP Scope 1 Expression Was: InDifferentialPairClass('90E')
DiffPairsRouting Diff_100E [InDifferentialPairClass('100E')] p1: maxlimit=10 minlimit=7 mostfreqgap=10 toplayer_maxgap=7 toplayer_prefgap=7 toplayer_minwidth=4 toplayer_maxwidth=4 toplayer_prefwidth=4 midlayer1_mingap=10 midlayer1_minwidth=15 midlayer1_maxwidth=15 midlayer1_prefwidth=15 midlayer2_mingap=8 midlayer2_maxgap=8 midlayer2_prefgap=8 midlayer2_minwidth=3.5 midlayer2_maxwidth=3.5 midlayer2_prefwidth=3.5 midlayer3_mingap=10 midlayer3_minwidth=15 midlayer3_maxwidth=15 midlayer3_prefwidth=15 midlayer6_mingap=10 midlayer6_minwidth=15 midlayer6_maxwidth=15 midlayer6_prefwidth=15 midlayer7_mingap=8 midlayer7_maxgap=8 midlayer7_prefgap=8 midlayer7_minwidth=3.5 midlayer7_maxwidth=3.5 midlayer7_prefwidth=3.5 midlayer8_mingap=10 midlayer8_minwidth=15 midlayer8_maxwidth=15 midlayer8_prefwidth=15 bottomlayer_maxgap=7 bottomlayer_prefgap=7 bottomlayer_minwidth=4 bottomlayer_maxwidth=4 bottomlayer_prefwidth=4 maxuncoupledlength=500
DiffPairsRouting Diff_90E [InDifferentialPairClass('90E')] p2: maxlimit=100 minlimit=4.5 mostfreqgap=10 toplayer_maxgap=4.5 toplayer_prefgap=4.5 toplayer_minwidth=4 toplayer_maxwidth=4 toplayer_prefwidth=4 midlayer1_mingap=10 midlayer1_minwidth=15 midlayer1_maxwidth=15 midlayer1_prefwidth=15 midlayer2_mingap=6 midlayer2_maxgap=6 midlayer2_prefgap=6 midlayer2_minwidth=4 midlayer2_maxwidth=4 midlayer2_prefwidth=4 midlayer3_mingap=10 midlayer3_minwidth=15 midlayer3_maxwidth=15 midlayer3_prefwidth=15 midlayer6_mingap=10 midlayer6_minwidth=15 midlayer6_maxwidth=15 midlayer6_prefwidth=15 midlayer7_mingap=6 midlayer7_maxgap=6 midlayer7_prefgap=6 midlayer7_minwidth=4 midlayer7_maxwidth=4 midlayer7_prefwidth=4 midlayer8_mingap=10 midlayer8_minwidth=15 midlayer8_maxwidth=15 midlayer8_prefwidth=15 bottomlayer_maxgap=4.5 bottomlayer_prefgap=4.5 bottomlayer_minwidth=4 bottomlayer_maxwidth=4 bottomlayer_prefwidth=4 maxuncoupledlength=1000
DiffPairsRouting Diff_120E [All] p3: maxlimit=10 minlimit=6.1 mostfreqgap=10 toplayer_maxgap=6.1 toplayer_prefgap=6.1 toplayer_minwidth=4 toplayer_maxwidth=4 toplayer_prefwidth=4 midlayer1_mingap=10 midlayer1_minwidth=15 midlayer1_maxwidth=15 midlayer1_prefwidth=15 midlayer2_mingap=10 midlayer2_minwidth=15 midlayer2_maxwidth=15 midlayer2_prefwidth=15 midlayer3_mingap=10 midlayer3_minwidth=15 midlayer3_maxwidth=15 midlayer3_prefwidth=15 midlayer6_mingap=10 midlayer6_minwidth=15 midlayer6_maxwidth=15 midlayer6_prefwidth=15 midlayer7_mingap=10 midlayer7_minwidth=15 midlayer7_maxwidth=15 midlayer7_prefwidth=15 midlayer8_mingap=10 midlayer8_minwidth=15 midlayer8_maxwidth=15 midlayer8_prefwidth=15 bottomlayer_maxgap=6.1 bottomlayer_prefgap=6.1 bottomlayer_minwidth=4 bottomlayer_maxwidth=4 bottomlayer_prefwidth=4 maxuncoupledlength=500
FabricationTestPointUsage TestPointUsage [All] p0: scope1count=1 scope1_0_kind=Board scope1_0_value=Board scope2count=1 scope2_0_kind=Board scope2_0_value=Board commentlength=0 valid=2 allowmultiple=FALSE
FabricationTestPointUsage TestPointUsage [All] p1: valid=2 allowmultiple=FALSE
FabricationTestpoint Testpoint [All] p0: scope1count=1 scope1_0_kind=Board scope1_0_value=Board scope2count=1 scope2_0_kind=Board scope2_0_value=Board commentlength=0 side=3 testpointundercomponent=TRUE minsize=40 maxsize=100 preferedsize=60 minholesize=0 maxholesize=40 preferedholesize=32 testpointgrid=1
FabricationTestpoint Testpoint [All] p1: side=3 testpointundercomponent=TRUE minsize=40 maxsize=100 preferedsize=60 minholesize=0 maxholesize=40 preferedholesize=32 testpointgrid=1 allowsidetop=TRUE allowsidebottom=TRUE usegrid=TRUE gridtolerance=0.01
FanoutControl Fanout_Small [All] p0 off: scope1count=1 scope1_0_kind=Board scope1_0_value=Board scope2count=1 scope2_0_kind=Board scope2_0_value=Board commentlength=84 // Protel DXP Scope 1 Expression Was: (CompPinCount < 5)   Fanout_Small (Default Rule)
FanoutControl Fanout_Default [All] p0: scope1count=1 scope1_0_kind=Board scope1_0_value=Board scope2count=1 scope2_0_kind=Board scope2_0_value=Board commentlength=30 // Fanout_Default (Default Rule)
FanoutControl Fanout_SOIC [All] p0 off: scope1count=1 scope1_0_kind=Board scope1_0_value=Board scope2count=1 scope2_0_kind=Board scope2_0_value=Board commentlength=71 // Protel DXP Scope 1 Expression Was: IsSOIC   Fanout_SOIC (Default Rule)
FanoutControl Fanout_BGA [All] p0 off: scope1count=1 scope1_0_kind=Board scope1_0_value=Board scope2count=1 scope2_0_kind=Board scope2_0_value=Board commentlength=69 // Protel DXP Scope 1 Expression Was: IsBGA   Fanout_BGA (Default Rule)
FanoutControl Fanout_LCC [All] p0 off: scope1count=1 scope1_0_kind=Board scope1_0_value=Board scope2count=1 scope2_0_kind=Board scope2_0_value=Board commentlength=69 // Protel DXP Scope 1 Expression Was: IsLCC   Fanout_LCC (Default Rule)
FanoutControl Fanout_LCC [IsLCC] p1: bgadir=Out bgaviamode=Centered fanoutstyle=Auto fanoutdirection=Alternating viagrid=1 // Fanout_LCC (Default Rule)
FanoutControl Fanout_BGA [IsBGA] p2: bgadir=Out bgaviamode=Centered fanoutstyle=Auto fanoutdirection=Alternating viagrid=1 // Fanout_BGA (Default Rule)
FanoutControl Fanout_Default [All] p4: bgadir=Out bgaviamode=Centered fanoutstyle=Auto fanoutdirection=Alternating viagrid=1 // Fanout_Default (Default Rule)
FanoutControl Fanout_Small [(CompPinCount < 5)] p5: bgadir=Out bgaviamode=Centered fanoutstyle=Auto fanoutdirection=OutThenIn viagrid=1 // Fanout_Small (Default Rule)
Height [All] p0: scope1count=1 scope1_0_kind=Board scope1_0_value=Board scope2count=1 scope2_0_kind=Board scope2_0_value=Board commentlength=0
HoleSize [All] p0: scope1count=1 scope1_0_kind=Board scope1_0_value=Board scope2count=1 scope2_0_kind=Board scope2_0_value=Board commentlength=0 absolutevalues=TRUE maxlimit=251 minlimit=5.9 maxpercent=80.000 minpercent=20.000
HoleSize [All] p1: absolutevalues=TRUE maxlimit=251 minlimit=5.9 maxpercent=80.000 minpercent=20.000
HoleToHoleClearance [All] p0: scope1count=1 scope1_0_kind=Board scope1_0_value=Board scope2count=1 scope2_0_kind=Board scope2_0_value=Board commentlength=0
LayerPairs [All] p0: scope1count=1 scope1_0_kind=Board scope1_0_value=Board scope2count=1 scope2_0_kind=Board scope2_0_value=Board commentlength=0 enforce=TRUE
MatchedLengths [All] p0: scope1count=1 scope1_0_kind=NetClass scope1_0_value=LVDS_IC scope2count=1 scope2_0_kind=Board scope2_0_value=Board commentlength=0 tolerance=20 amplitude=200 gap=20 style=90-Degree
MatchedLengths AR_DMM [All] p0 off: scope1count=1 scope1_0_kind=Board scope1_0_value=Board scope2count=1 scope2_0_kind=Board scope2_0_value=Board commentlength=63 tolerance=100 amplitude=200 gap=20 style=90-Degree // Protel DXP Scope 1 Expression Was: InxSignalClass('AR_DMM')
MatchedLengths USB [All] p0 off: scope1count=1 scope1_0_kind=Board scope1_0_value=Board scope2count=1 scope2_0_kind=Board scope2_0_value=Board commentlength=60 tolerance=5 amplitude=200 gap=20 style=90-Degree // Protel DXP Scope 1 Expression Was: InxSignalClass('USB')
MatchedLengths JTAG [All] p0 off: scope1count=1 scope1_0_kind=Board scope1_0_value=Board scope2count=1 scope2_0_kind=Board scope2_0_value=Board commentlength=61 tolerance=100 amplitude=200 gap=20 style=90-Degree // Protel DXP Scope 1 Expression Was: InxSignalClass('JTAG')
MatchedLengths SPI [All] p0 off: scope1count=1 scope1_0_kind=Board scope1_0_value=Board scope2count=1 scope2_0_kind=Board scope2_0_value=Board commentlength=70 tolerance=200 amplitude=200 gap=20 style=90-Degree // Protel DXP Scope 1 Expression Was: InxSignalClass('SPI & HOSTINT')
MatchedLengths QSPI [All] p0 off: scope1count=1 scope1_0_kind=Board scope1_0_value=Board scope2count=1 scope2_0_kind=Board scope2_0_value=Board commentlength=61 tolerance=100 amplitude=200 gap=20 style=90-Degree // Protel DXP Scope 1 Expression Was: InxSignalClass('QSPI')
MatchedLengths [InNetClass('LVDS_IC')] p1: tolerance=20 checknetsindiffpair=FALSE checkdiffpairvsdiffpair=TRUE checkxsignals=TRUE checkothers=TRUE
MatchedLengths AR_DMM [InxSignalClass('AR_DMM')] p2: tolerance=100 checknetsindiffpair=FALSE checkdiffpairvsdiffpair=TRUE checkxsignals=TRUE checkothers=TRUE
MatchedLengths USB [InxSignalClass('USB')] p3: tolerance=5 checknetsindiffpair=TRUE checkdiffpairvsdiffpair=FALSE checkxsignals=FALSE checkothers=FALSE
MatchedLengths QSPI [InxSignalClass('QSPI')] p4: tolerance=100 checknetsindiffpair=FALSE checkdiffpairvsdiffpair=TRUE checkxsignals=TRUE checkothers=TRUE
MatchedLengths SPI [InxSignalClass('SPI & HOSTINT')] p5: tolerance=200 checknetsindiffpair=FALSE checkdiffpairvsdiffpair=TRUE checkxsignals=TRUE checkothers=TRUE
MatchedLengths JTAG [InxSignalClass('JTAG')] p6: tolerance=100 checknetsindiffpair=FALSE checkdiffpairvsdiffpair=TRUE checkxsignals=TRUE checkothers=TRUE
MinimumAnnularRing [All] p0: scope1count=1 scope1_0_kind=Board scope1_0_value=Board scope2count=1 scope2_0_kind=Board scope2_0_value=Board commentlength=0 minimumring=3
MinimumAnnularRing MinimumAnnularRing_ThermalPadVias [All] p0 off: scope1count=1 scope1_0_kind=Board scope1_0_value=Board scope2count=1 scope2_0_kind=Board scope2_0_value=Board commentlength=63 minimumring=3 // Protel DXP Scope 1 Expression Was: IsVia and InAnyComponent
MinimumAnnularRing MinimumAnnularRing_ThermalPadVias [IsVia and InAnyComponent] p1: minimumring=3
MinimumAnnularRing [All] p2: minimumring=3
MinimumSolderMaskSliver [All] p0: scope1count=1 scope1_0_kind=Board scope1_0_value=Board scope2count=1 scope2_0_kind=Board scope2_0_value=Board commentlength=0
MinimumSolderMaskSliver [All] p1: minsoldermaskwidth=3
NetAntennae [All] p0: scope1count=1 scope1_0_kind=Board scope1_0_value=Board scope2count=1 scope2_0_kind=Board scope2_0_value=Board commentlength=0
PasteMaskExpansion [All] p0: scope1count=1 scope1_0_kind=Board scope1_0_value=Board scope2count=1 scope2_0_kind=Board scope2_0_value=Board commentlength=0 expansion=0
PlaneClearance [All] p0: scope1count=1 scope1_0_kind=Board scope1_0_value=Board scope2count=1 scope2_0_kind=Board scope2_0_value=Board commentlength=0 clearance=20
PlaneConnect [All] p0: scope1count=1 scope1_0_kind=Board scope1_0_value=Board scope2count=1 scope2_0_kind=Board scope2_0_value=Board commentlength=0 planeconnectstyle=Direct reliefexpansion=10 reliefentries=4 reliefconductorwidth=10 reliefairgap=10
PlaneConnect [All] p1: planeconnectstyle=Direct reliefexpansion=10 reliefentries=4 reliefconductorwidth=10 reliefairgap=10
PolygonConnect [All] p0: scope1count=1 scope1_0_kind=Board scope1_0_value=Board scope2count=1 scope2_0_kind=Board scope2_0_value=Board commentlength=0 connectstyle=Direct reliefconductorwidth=10 reliefentries=4 polygonreliefangle="90 Angle"
PolygonConnect [All] p1: connectstyle=Direct reliefconductorwidth=10 reliefentries=4 polygonreliefangle="90 Angle" airgapwidth=10
RoomDefinition BGA [All] p0: scope1count=1 scope1_0_kind=ComponentClass scope1_0_value=60GHz-AOP_IR_FLASH scope2count=1 scope2_0_kind=Board scope2_0_value=Board commentlength=0 region_x1=44490000 region_y1=53680000 region_x2=50747070 region_y2=59816060 confinementstyle=ConfineIn
RoomDefinition BGA [InComponentClass('60GHz-AOP_IR_FLASH')] p1: confinementstyle=ConfineIn formatcopy=TRUE lockcomponents=FALSE outline 3757.84,4447.61 4382.71,4447.61 4382.71,3834 3757,3834
RoutingCorners [All] p0: scope1count=1 scope1_0_kind=Board scope1_0_value=Board scope2count=1 scope2_0_kind=Board scope2_0_value=Board commentlength=0 cornerstyle=45-Degree minsetback=100 maxsetback=100
RoutingLayers [All] p0: scope1count=1 scope1_0_kind=Board scope1_0_value=Board scope2count=1 scope2_0_kind=Board scope2_0_value=Board commentlength=0 top layer=Automatic mid layer 1=Automatic mid layer 2=Automatic mid layer 3=Automatic mid layer 6=Automatic mid layer 7=Automatic mid layer 8=Automatic bottom layer=Automatic
RoutingPriority [All] p0: scope1count=1 scope1_0_kind=Board scope1_0_value=Board scope2count=1 scope2_0_kind=Board scope2_0_value=Board commentlength=0
RoutingTopology [All] p0: scope1count=1 scope1_0_kind=Board scope1_0_value=Board scope2count=1 scope2_0_kind=Board scope2_0_value=Board commentlength=0 topology=Shortest
RoutingVias [All] p0: scope1count=1 scope1_0_kind=Board scope1_0_value=Board scope2count=1 scope2_0_kind=Board scope2_0_value=Board commentlength=0 holewidth=8 width=18 viastyle="Through Hole" minholewidth=7.87 minwidth=17 maxholewidth=40 maxwidth=30
RoutingVias ThermalPadVias [All] p0 off: scope1count=1 scope1_0_kind=Board scope1_0_value=Board scope2count=1 scope2_0_kind=Board scope2_0_value=Board commentlength=63 holewidth=7.87 width=19.68 viastyle="Through Hole" minholewidth=7.87 minwidth=19.68 maxholewidth=12.99 maxwidth=23.62 // Protel DXP Scope 1 Expression Was: IsVia and InAnyComponent
RoutingVias [All] p1: holewidth=8 width=18 viastyle="Through Hole" minholewidth=7.87 minwidth=17 maxholewidth=40 maxwidth=30
RoutingVias ThermalPadVias [IsVia and InAnyComponent] p2: holewidth=7.87 width=19.68 viastyle="Through Hole" minholewidth=7.87 minwidth=19.68 maxholewidth=12.99 maxwidth=23.62
ShortCircuit [All] p0: scope1count=1 scope1_0_kind=Board scope1_0_value=Board scope2count=1 scope2_0_kind=Board scope2_0_value=Board commentlength=0 allowed=FALSE
SilkToBoardRegionClearance [All] p0 off: scope1count=1 scope1_0_kind=Board scope1_0_value=Board scope2count=1 scope2_0_kind=Board scope2_0_value=Board commentlength=130 // Protel DXP Scope 1 Expression Was: Not ((IsComment or IsDesignator) And (Hide <> 'False')) and not InRegion(1000,500,4000,800)
SilkToBoardRegionClearance [Not ((IsComment or IsDesignator) And (Hide <> 'False')) and not InRegion(1000,500,4000,800)] p1:
SilkToSilkClearance [All] p0: scope1count=1 scope1_0_kind=Board scope1_0_value=Board scope2count=1 scope2_0_kind=Board scope2_0_value=Board commentlength=0
SilkToSilkClearance [All] p1: silktosilkclearance=3
SilkToSolderMaskClearance "Silk to Solder Mask Opening" [All] p0: scope1count=1 scope1_0_kind=Board scope1_0_value=Board scope2count=1 scope2_0_kind=Board scope2_0_value=Board commentlength=0
SilkToSolderMaskClearance SilkToComponentPadClearance [All] p0 off: scope1count=1 scope1_0_kind=Board scope1_0_value=Board scope2count=1 scope2_0_kind=Board scope2_0_value=Board commentlength=87 // Protel DXP Scope 1 Expression Was: (IsPad or IsFill or IsRegion) and InAnycomponent
SilkToSolderMaskClearance SilkToComponentPadClearance [(IsPad or IsFill or IsRegion) and InAnycomponent] p1: minsilkscreentomaskgap=3 clearancetoexposedcopper=TRUE
SilkToSolderMaskClearance "Silk to Solder Mask Opening" [All] p2: minsilkscreentomaskgap=3 clearancetoexposedcopper=FALSE
SolderMaskExpansion [All] p0: scope1count=1 scope1_0_kind=Board scope1_0_value=Board scope2count=1 scope2_0_kind=Board scope2_0_value=Board commentlength=0 expansion=1.97
SolderMaskExpansion [All] p1: expansion=1.97
UnRoutedNet [All] p0: scope1count=1 scope1_0_kind=Board scope1_0_value=Board scope2count=1 scope2_0_kind=Board scope2_0_value=Board commentlength=0
UnpouredPolygon [All] p0: scope1count=1 scope1_0_kind=Board scope1_0_value=Board scope2count=1 scope2_0_kind=Board scope2_0_value=Board commentlength=0
Width RF [All] p0: scope1count=1 scope1_0_kind=NetClass scope1_0_value=RF scope2count=1 scope2_0_kind=Board scope2_0_value=Board commentlength=0 maxlimit=100 minlimit=5.5 preferedwidth=10
Width [All] p0: scope1count=1 scope1_0_kind=Board scope1_0_value=Board scope2count=1 scope2_0_kind=Board scope2_0_value=Board commentlength=0 maxlimit=100 minlimit=4 preferedwidth=6
Width RF [InNetClass('RF')] p1: maxlimit=100 minlimit=5.5 preferedwidth=10 toplayer_prefwidth=12 midlayer1_minwidth=10 midlayer1_maxwidth=10 midlayer2_minwidth=10 midlayer2_maxwidth=10 midlayer3_minwidth=10 midlayer3_maxwidth=10 midlayer6_minwidth=10 midlayer6_maxwidth=10 midlayer7_minwidth=10 midlayer7_maxwidth=10 midlayer8_minwidth=10 midlayer8_maxwidth=10 bottomlayer_minwidth=10 bottomlayer_maxwidth=10 minimp=50.000000 maximp=50.000000 favimp=50.000000
Width [All] p2: maxlimit=100 minlimit=4 preferedwidth=6 toplayer_maxwidth=40 toplayer_prefwidth=5.5 midlayer1_minwidth=4.2 midlayer1_maxwidth=20 midlayer1_prefwidth=4.2 midlayer2_minwidth=4.2 midlayer2_maxwidth=20 midlayer2_prefwidth=4.2 midlayer7_minwidth=4.2 midlayer7_maxwidth=20 midlayer7_prefwidth=4.2 midlayer8_minwidth=6 midlayer8_prefwidth=10 bottomlayer_maxwidth=40 bottomlayer_prefwidth=5.5 minimp=50.000000 maximp=50.000000 favimp=50.000000
15 further rules are at their usual default settings.

## Classes and differential pairs
net class LVDS_CONN: NetJ2_28 NetJ2_30 NetJ2_34 NetJ2_36 NetJ2_40 NetJ2_42 NetJ2_46 NetJ2_48
net class LVDS_IC: AR_LVDS_0_N AR_LVDS_0_P AR_LVDS_1_N AR_LVDS_1_P AR_LVDS_CLK_N AR_LVDS_CLK_P AR_LVDS_FRCLK_N AR_LVDS_FRCLK_P
net class RF: NetA1_4 NetC21_2 NetC22_1 NetC41_1 NetC93_1 NetC93_2 RF_N RF_P
component class PROC091F_RST_GPIOs_I2C: C6 C9 C10 C11 C12 C13 C38 C39 C72 C120 C125 J3 LD2 LD3 LD5 Q1 R13 R18 R38 R42 R51 R57 R67 R68 R69 R70 R71 R72 R73 R77 R78 R80 R81 R82 R93 R96 R97 R98 R107 R108 R111 R124 R125 R129 R177 R178 SW2 SW3 TP15 TP20 U5 U6 U7 U16 Y4
component class PROC091F_PMIC: C30 C31 C32 C33 C34 C44 C45 C46 C47 C48 C49 C50 C51 C52 C53 C54 C77 FL1 FL8 FL9 FL10 FL20 L2 L3 L4 L5 L11 L12 L13 L14 LD1 R25 R26 R28 R31 R32 R33 R34 R35 R36 R37 R39 R50 R52 R53 R54 R55 R56 TP5 TP12 U1
component class PROC091F_HD_CONN_PWR_SW: C127 C128 C129 D2 FL11 FL22 J2 R10 R11 R12 R14 R20 R24 R27 R29 R58 R88 R92 R130 R132 R133 R135 R137 R138 R140 RA1 RA2 RA3 RA4 RA5 RA6 RA7 RA8 RA9 TP10 TP13 U19
component class PROC091F_FLASH_USB_TO_UART: C1 C2 C3 C4 C100 C101 C126 D1 FL2 J1 LD4 R6 R15 R19 R40 R41 R43 R44 R45 R46 R47 R48 R49 R60 R61 R62 R63 R64 R65 TP18 TP19 TP26 U3 U9 U18
component class PROC091F_CAN_INTERFACE: C40 C43 C105 C106 C107 C108 C109 C110 FL3 FL12 J8 J10 R66 R74 R104 R105 R106 R114 R115 R116 R117 R118 R119 R120 R121 R122 R123 R126 R127 R128 R134 R136 R139 R141 U11 U12 U13 U17
component class PROC091F_BT_DISPLAY: A1 C5 C7 C8 C15 C16 C17 C18 C19 C20 C21 C22 C23 C24 C25 C26 C27 C28 C29 C35 C36 C37 C41 C86 C93 C99 C104 C114 C115 C116 C117 C118 C119 J4 J6 J7 L1 L6 L7 L8 L9 L10 LD6 R17 R30 R76 R79 R86 R87 R89 R90 R91 R94 R95 R99 R100 R101 R102 R110 R112 R113 R131 R160 R161 R166 R168 R180 R181 R182 R183 R184 R185 TP16 TP27 TP46 U4 U8 U10 U14 Y2 Y3
component class PROC091F_AOP_PWR: C55 C56 C57 C58 C59 C60 C61 C62 C63 C64 C65 C66 C67 C68 C69 C70 C73 C74 C75 C76 C78 C79 C80 C81 C82 C83 C84 C85 C87 C88 C89 C90 C91 C92 C94 C95 C96 C97 C98 C102 C103 FL6 FL7 TP11
component class PROC091F_AOP_IO: C14 C71 C130 J9 R2 R3 R4 R5 R7 R8 R9 R21 R22 R23 R59 R75 R83 R84 R85 R103 R109 R158 R159 R170 R171 R172 R174 R176 S3 TP2 TP3 TP6 TP7 TP8 TP9 TP14 TP17 U2 Y1
component class PROC091F_ANALOG_MUX: C42 C122 C123 FL14 J5 R1 R16 S1 S2 TP4 U15
component class PROC091F_Hardware: FID1 FID2 FID3 FID4 FID5 FID6 ZZ1 ZZ2 ZZ3 ZZ4 ZZ5.1 ZZ5.2
component class FiducialMark: FID1 FID2 FID3 FID4 FID5 FID6
component class AssemblyNote: ZZ1 ZZ2 ZZ3 ZZ4 ZZ5.1 ZZ5.2
differential pair CAN2: +NetJ10_1 -NetJ10_3
differential pair NewDifferentialPair1: +NetR41_1 -NetR60_1
differential pair USB: +USB_DM -USB_DP
differential pair CAN: +NetJ8_1 -NetJ8_3
differential pair X48M: +X48M_N -X48M_P
differential pair AR_XTAL: +AR_XTAL_N -AR_XTAL_P
differential pair AR_LVDS_FRCLK: +AR_LVDS_FRCLK_N -AR_LVDS_FRCLK_P
differential pair AR_LVDS_CLK: +AR_LVDS_CLK_N -AR_LVDS_CLK_P
differential pair AR_LVDS_1: +AR_LVDS_1_N -AR_LVDS_1_P
differential pair " ": +AR_LVDS_0_N -AR_LVDS_0_P

## Components (designator, comment, footprint, x,y, rotation, side; value= is the part's Value field where it differs from the comment)
A1 "ANT016008LCS2442MA2" FP-ANT016008LCS2442MA2_SMT_ANT-0 6517.1,4550.46 r180 top
C1 "CL05A106MP5NUNC" 0402_070 3245.8,4221.22 r90 top
C2 "GRM033R6YA104KE14D" "FP-GRM033R6YA104KE14D_0201 (0603 Metric)-IPC_C" 3785.88,4170.74 r90 bottom
C3 "GRM033R6YA104KE14D" "FP-GRM033R6YA104KE14D_0201 (0603 Metric)-IPC_C" 3772.95,4125.72 r180 bottom
C4 "CL05A106MP5NUNC" 0402_070 3226.3,4334.4 r90 bottom
C5 "CL03A105MO3NRNH" FP-CL03A105MO3NRNH_0201-IPC_C 6371,3977 r180 bottom
C6 "GRM033R6YA104KE14D" "FP-GRM033R6YA104KE14D_0201 (0603 Metric)-IPC_C" 5221.01,4103.02 r0 bottom locked
C7 "CL05A106MP5NUNC" 0402_070 6332.97,3720.79 r0 bottom
C8 "CL03A103KA3NNNC" FP-CL03A103KA3NNNC_0201-IPC_C 6391.38,3719.01 r180 bottom
C9 "GRM033R6YA104KE14D" "FP-GRM033R6YA104KE14D_0201 (0603 Metric)-IPC_C" 5197.1,3791.56 r90 bottom locked
C10 "GRM033R6YA104KE14D" "FP-GRM033R6YA104KE14D_0201 (0603 Metric)-IPC_C" 5157.67,3880.39 r90 bottom locked
C11 "CL03A105MO3NRNH" FP-CL03A105MO3NRNH_0201-IPC_C 5160.25,3791.5 r270 bottom locked
C12 "GRM033R6YA104KE14D" "FP-GRM033R6YA104KE14D_0201 (0603 Metric)-IPC_C" 5598.06,3727.05 r90 bottom
C13 "GRM033R6YA104KE14D" "FP-GRM033R6YA104KE14D_0201 (0603 Metric)-IPC_C" 5227.18,4028.9 r0 bottom
C14 "GRM0335C1H4R7BA01D" 0201_033L 3719.34,4001.36 r90 top
C15 "CL03A105MO3NRNH" FP-CL03A105MO3NRNH_0201-IPC_C 4785.89,4131.62 r270 top locked
C16 "CL03A105MO3NRNH" FP-CL03A105MO3NRNH_0201-IPC_C 4753.82,4132.42 r270 top locked
C17 "GRM0335C1H8R0BA01D" "FP-GRM0335C1H8R0BA01D_0201 (0603 metric)-IPC_C" 6038.8,4212.94 r90 top
C18 "GRM0335C1H8R0BA01D" "FP-GRM0335C1H8R0BA01D_0201 (0603 metric)-IPC_C" 6038.8,4166.75 r270 top
C19 "250R05L120JV4T" FP-250R05L120JV4T_0201-IPC_C 5765.79,4370.87 r270 top
C20 "250R05L120JV4T" FP-250R05L120JV4T_0201-IPC_C 5765.79,4324.98 r90 top
C21 "CL05C120JB5NNNC" 0402L 6028.92,4344.09 r270 top
C22 "GCM1555C1H1R0CA16D" 0402L 5956.7,4395.47 r270 top
C23 "GCM1555C1H1R0CA16D" 0402L 5883.59,4324.42 r180 top
C24 "CL03A105MO3NRNH" FP-CL03A105MO3NRNH_0201-IPC_C 5630.51,4003.46 r180 top
C25 "GRM033R6YA104KE14D" "FP-GRM033R6YA104KE14D_0201 (0603 Metric)-IPC_C" 5629.37,4224.38 r180 top
C26 "GRM033R6YA104KE14D" "FP-GRM033R6YA104KE14D_0201 (0603 Metric)-IPC_C" 5630.37,4042.21 r180 top
C27 "GRM033R6YA104KE14D" "FP-GRM033R6YA104KE14D_0201 (0603 Metric)-IPC_C" 6047.37,4128.46 r0 top
C28 "CL05A226MQ5N6J8" FP-CL05A226MQ5N6J8_0402-IPC_C 5984.12,3931.35 r270 top
C29 "CL05A226MQ5N6J8" FP-CL05A226MQ5N6J8_0402-IPC_C 5958.37,4142.46 r180 bottom
C30 "LMK063BJ224MP-F" 0201_033L 3304,4158.52 r90 top
C31 "TMK063CG391JT-F" "FP-TMK063CG391JT-F_0201 (0603 Metric)-IPC_C" 3562.13,4311.22 r90 top
C32 "TMK063CG391JT-F" "FP-TMK063CG391JT-F_0201 (0603 Metric)-IPC_C" 3268.13,4312.11 r90 top
C33 "TMK063CG391JT-F" "FP-TMK063CG391JT-F_0201 (0603 Metric)-IPC_C" 3559.04,4025.1 r90 top
C34 "TMK063CG391JT-F" "FP-TMK063CG391JT-F_0201 (0603 Metric)-IPC_C" 3277.23,4022.75 r90 top
C35 "GRM033R6YA104KE14D" "FP-GRM033R6YA104KE14D_0201 (0603 Metric)-IPC_C" 5959.54,4181.25 r180 bottom
C36 "GRM033R6YA104KE14D" "FP-GRM033R6YA104KE14D_0201 (0603 Metric)-IPC_C" 6006.44,4219.38 r0 top
C37 "GRM033R6YA104KE14D" "FP-GRM033R6YA104KE14D_0201 (0603 Metric)-IPC_C" 5775.38,4411.08 r180 top
C38 "250R05L120JV4T" FP-250R05L120JV4T_0201-IPC_C 5240.41,3795.13 r180 bottom locked
C39 "250R05L120JV4T" FP-250R05L120JV4T_0201-IPC_C 5286.16,3795.3 r0 bottom locked
C40 "GRM033R6YA104KE14D" "FP-GRM033R6YA104KE14D_0201 (0603 Metric)-IPC_C" 4970.37,3934.38 r0 top locked
C41 "GCM1555C1H1R0CA16D" 0402L 5975.28,4530.78 r270 top
C42 "CL05A106MP5NUNC" 0402_070 6310,4040 r90 top
C43 "GRM033R6YA104KE14D" "FP-GRM033R6YA104KE14D_0201 (0603 Metric)-IPC_C" 5497.81,4202.58 r90 bottom
C44 "CL05A226MQ5N6J8" FP-CL05A226MQ5N6J8_0402-IPC_C 3430.22,4377.73 r270 top
C45 "CL05A226MQ5N6J8" FP-CL05A226MQ5N6J8_0402-IPC_C 3396.5,4377.26 r270 top
C46 "CL05A226MQ5N6J8" FP-CL05A226MQ5N6J8_0402-IPC_C 3429.83,3925.6 r90 top
C47 "CL05A226MQ5N6J8" FP-CL05A226MQ5N6J8_0402-IPC_C 3395.41,3925.76 r90 top
C48 "CL05A226MQ5N6J8" FP-CL05A226MQ5N6J8_0402-IPC_C 3836.23,4067.82 r180 bottom
C49 "CL05A226MQ5N6J8" FP-CL05A226MQ5N6J8_0402-IPC_C 4217.54,4191.28 r270 bottom
C50 "CL05A106MP5NUNC" 0402_070 3448.11,4283.77 r180 top
C51 "CL05A106MP5NUNC" 0402_070 3385.11,4283.77 r0 top
C52 "CL05A106MP5NUNC" 0402_070 3385.11,4033.27 r0 top
C53 "CL05A106MP5NUNC" 0402_070 3448.11,4033.27 r180 top
C54 "CL05A226MQ5N6J8" FP-CL05A226MQ5N6J8_0402-IPC_C 4185.58,4190.34 r270 bottom
C55 "CL05A106MP5NUNC" 0402_070 4115.16,4356.5 r90 bottom
C56 "LMK063BJ224MP-F" 0201_033L 4166.37,4378.24 r0 bottom
C57 "LMK063BJ224MP-F" 0201_033L 4168.42,4409.4 r0 bottom
C58 "LMK063BJ224MP-F" 0201_033L 4125.06,4410.16 r180 bottom
C59 "CL05A106MP5NUNC" 0402_070 4128.3,3985.94 r0 bottom
C60 "LMK063BJ224MP-F" 0201_033L 4378.33,3871.66 r270 top
C61 "LMK063BJ224MP-F" 0201_033L 4270.98,4185.3 r180 bottom
C62 "CL05A106MP5NUNC" 0402_070 3907,4128 r0 bottom
C63 "LMK063BJ224MP-F" 0201_033L 3737.19,4226.49 r90 top
C64 "LMK063BJ224MP-F" 0201_033L 3907,4159 r0 bottom
C65 "CL05A106MP5NUNC" 0402_070 3911,4188 r0 bottom
C66 "LMK063BJ224MP-F" 0201_033L 3908.02,4218 r0 bottom
C67 "LMK063BJ224MP-F" 0201_033L 3848,4327 r90 bottom
C68 "LMK063BJ224MP-F" 0201_033L 3884.37,4409.24 r0 bottom
C69 "GRM033R61C473KE84D" 0201_033L 3734.67,4322.98 r270 top
C70 "CL05A106MP5NUNC" 0402_070 3891,4337 r180 bottom
C71 "GRM0335C1H4R7BA01D" 0201_033L 3722.86,4065.25 r270 top
C72 "GRM033R6YA104KE14D" "FP-GRM033R6YA104KE14D_0201 (0603 Metric)-IPC_C" 4853.37,4217.48 r270 top
C73 "CL05A106MP5NUNC" 0402_070 3897,4303 r180 bottom
C74 "CL03A225MQ3CRNC" 0201L 3945.46,4346.38 r180 bottom
C75 "LMK063BJ224MP-F" 0201_033L 3945.46,4409.24 r180 bottom
C76 "LMK063BJ224MP-F" 0201_033L 3945.46,4377.91 r180 bottom
C77 "CL05A226MQ5N6J8" FP-CL05A226MQ5N6J8_0402-IPC_C 3415.03,4422.66 r0 top
C78 "CL05A106MP5NUNC" 0402_070 4038.9,4317.13 r180 bottom
C79 "CL03A225MQ3CRNC" 0201L 4071.88,4346.34 r0 bottom
C80 "LMK063BJ224MP-F" 0201_033L 4073.37,4377.75 r0 bottom
C81 "LMK063BJ224MP-F" 0201_033L 4071.88,4409.36 r0 bottom
C82 "CL05A106MP5NUNC" 0402_070 4001.02,4277.32 r0 bottom
C83 "CL03A225MQ3CRNC" 0201L 4008.9,4346.15 r0 bottom
C84 "LMK063BJ224MP-F" 0201_033L 4009.24,4377.83 r0 bottom
C85 "LMK063BJ224MP-F" 0201_033L 4009.24,4409.33 r0 bottom
C86 "GRM033R6YA104KE14D" "FP-GRM033R6YA104KE14D_0201 (0603 Metric)-IPC_C" 5910.41,3935.32 r0 bottom
C87 "LMK063BJ224MP-F" 0201_033L 4025.62,3891.02 r0 bottom
C88 "LMK063BJ224MP-F" 0201_033L 4394.91,4124.76 r0 top
C89 "CGB2A1X6S0J105K033BC" 0402L 3717.5,4135.45 r180 top
C90 "CGB2A1X6S0J105K033BC" 0402L 3717.37,4182.85 r180 top
C91 "GRM033R6YA104KE14D" "FP-GRM033R6YA104KE14D_0201 (0603 Metric)-IPC_C" 4292.99,4035.17 r180 bottom
C92 "GRM033R6YA104KE14D" "FP-GRM033R6YA104KE14D_0201 (0603 Metric)-IPC_C" 4065.74,3883.1 r90 bottom
C93 "CL05C120JB5NNNC" 0402L 6205.98,4550.46 r180 top
C94 "LMK063BJ224MP-F" 0201_033L 4293.19,3964.68 r180 bottom
C95 "LMK063BJ224MP-F" 0201_033L 3922.37,3891.76 r90 bottom
C96 "LMK063BJ224MP-F" 0201_033L 4388.37,4235.76 r90 top
C97 "LMK063BJ224MP-F" 0201_033L 3779.79,4050.2 r90 bottom
C98 "LMK063BJ224MP-F" 0201_033L 4388.37,4297.76 r270 top
C99 "GJM1555C1H1R8BB01D" 0402L 6328.98,4550.46 r180 top
C100 "CL03A105MO3NRNH" FP-CL03A105MO3NRNH_0201-IPC_C 3741.24,3861.69 r0 bottom
C101 "GRM033R6YA104KE14D" "FP-GRM033R6YA104KE14D_0201 (0603 Metric)-IPC_C" 3741,3881.17 r0 bottom
C102 "CL03A225MQ3CRNC" 0201L 4393.22,4090.26 r0 top
C103 "CL03A225MQ3CRNC" 0201L 4291.98,4058.8 r180 bottom
C104 "GJM1555C1H1R8BB01D" 0402L 6450.41,4530.78 r270 top
C105 "GRM033R6YA104KE14D" "FP-GRM033R6YA104KE14D_0201 (0603 Metric)-IPC_C" 5402.37,4347.37 r90 bottom
C106 "GRM155R71H472KA01D" 0402L 5574,4430.51 r270 bottom
C107 "GRM033R6YA104KE14D" "FP-GRM033R6YA104KE14D_0201 (0603 Metric)-IPC_C" 6223.22,4433.22 r90 top
C108 "GRM033R6YA104KE14D" "FP-GRM033R6YA104KE14D_0201 (0603 Metric)-IPC_C" 6197.97,3866.01 r270 top
C109 "GRM033R6YA104KE14D" "FP-GRM033R6YA104KE14D_0201 (0603 Metric)-IPC_C" 6365.6,3768.9 r0 top
C110 "GRM155R71H472KA01D" 0402L 6440,3773.61 r90 top
C114 "GRM033R6YA104KE14D" "FP-GRM033R6YA104KE14D_0201 (0603 Metric)-IPC_C" 5662.76,3747.34 r180 bottom
C115 "CL03A105MO3NRNH" FP-CL03A105MO3NRNH_0201-IPC_C 5685.98,3907.2 r0 top
C116 "CL03A105MO3NRNH" FP-CL03A105MO3NRNH_0201-IPC_C 5686.69,3878.74 r0 top
C117 "GRM033R6YA104KE14D" "FP-GRM033R6YA104KE14D_0201 (0603 Metric)-IPC_C" 5334.39,4536.81 r0 bottom locked
C118 "GRM033R6YA104KE14D" "FP-GRM033R6YA104KE14D_0201 (0603 Metric)-IPC_C" 5760.69,3733.87 r270 bottom
C119 "GRM033R6YA104KE14D" "FP-GRM033R6YA104KE14D_0201 (0603 Metric)-IPC_C" 5797.1,3909.21 r90 bottom
C120 "GRM033R6YA104KE14D" "FP-GRM033R6YA104KE14D_0201 (0603 Metric)-IPC_C" 4784.37,4437.46 r90 top
C122 "CL05A106MP5NUNC" 0402_070 6260,4040 r270 top
C123 "GRM033R6YA104KE14D" "FP-GRM033R6YA104KE14D_0201 (0603 Metric)-IPC_C" 5489.38,3956.46 r180 bottom
C125 "CL03A103KA3NNNC" FP-CL03A103KA3NNNC_0201-IPC_C 5270.83,4102.9 r0 bottom locked
C126 "GRM033R6YA104KE14D" "FP-GRM033R6YA104KE14D_0201 (0603 Metric)-IPC_C" 3679.93,4262.91 r0 top
C127 "GRM033R6YA104KE14D" "FP-GRM033R6YA104KE14D_0201 (0603 Metric)-IPC_C" 6141.37,3936.75 r180 bottom
C128 "GRM033R6YA104KE14D" "FP-GRM033R6YA104KE14D_0201 (0603 Metric)-IPC_C" 6131.47,3761.12 r180 bottom
C129 "CL03A105MO3NRNH" FP-CL03A105MO3NRNH_0201-IPC_C 6207.77,3815.74 r270 bottom
C130 "GRM033R6YA104KE14D" "FP-GRM033R6YA104KE14D_0201 (0603 Metric)-IPC_C" 4251.69,4228 r180 bottom
D1 "NSR20F30NXT5G" DSN2_0603 3229.54,4211.99 r270 bottom
D2 "NSR20F30NXT5G" DSN2_0603 4603.84,3756.88 r0 top locked
Designator1 "Comment" MHNP_M2_PANHEAD_PHILLIPS 3109.58,4791.47 r0 top
Designator1_1 "BRAKE_WAY_HOLES1X2" BRAKE_WAY_HOLES1X2 3221.89,3788.2 r180 bottom
Designator2 "BRAKE_WAY_HOLES1X2" BRAKE_WAY_HOLES1X2 3778.11,4495.01 r180 top
Designator2_1 "BRAKE_WAY_HOLES1X2" BRAKE_WAY_HOLES1X2 3778.11,3788.2 r180 bottom
Designator3 "BRAKE_WAY_HOLES1X2" BRAKE_WAY_HOLES1X2 4273.11,4495.01 r180 top
Designator3_1 "BRAKE_WAY_HOLES1X2" BRAKE_WAY_HOLES1X2 4273.11,3788.2 r180 bottom
Designator4 "BRAKE_WAY_HOLES1X2" BRAKE_WAY_HOLES1X2 4688.11,4648.59 r180 top
Designator4_1 "BRAKE_WAY_HOLES1X2" BRAKE_WAY_HOLES1X2 4688.11,3650.25 r180 bottom
Designator5 "BRAKE_WAY_HOLES1X2" BRAKE_WAY_HOLES1X2 6176.11,4648.39 r180 top
Designator5_1 "BRAKE_WAY_HOLES1X2" BRAKE_WAY_HOLES1X2 6176.11,3650.45 r180 bottom
Designator5_2 "BRAKE_WAY_HOLES1X2" BRAKE_WAY_HOLES1X2 5433.11,3650.05 r180 bottom
Designator6 "Comment" MHNP_M2_PANHEAD_PHILLIPS 6500.3,4791.47 r0 top
Designator7 "Comment" MHNP_M2_PANHEAD_PHILLIPS 3109.58,3507.37 r0 top
Designator8 "Comment" MHNP_M2_PANHEAD_PHILLIPS 6500.3,3507.37 r0 top
Designator10 "BRAKE_WAY_HOLES1X2" BRAKE_WAY_HOLES1X2 3221.89,4495.01 r180 top
Designator22_1 "Comment" MHNP_2-5 5908.96,3794.29 r0 bottom
Designator23 "Comment" MHNP_2-5 5014.62,3794.28 r0 bottom locked
FID1 "Fiducial" FIDUCIAL6.4-20 3259.58,3507.37 r0 top
FID2 "Fiducial" FIDUCIAL6.4-20 3259.58,4791.47 r0 top
FID3 "Fiducial" FIDUCIAL6.4-20 6350.3,3507.37 r0 top
FID4 "Fiducial" FIDUCIAL6.4-20 6350.3,3507.37 r180 bottom
FID5 "Fiducial" FIDUCIAL6.4-20 3259.58,4791.47 r180 bottom
FID6 "Fiducial" FIDUCIAL6.4-20 3259.58,3507.37 r180 bottom
FL1 "BLM15PD300SZ1D" 0402L 3949.54,4288.55 r90 bottom
FL2 "BLM15PD300SZ1D" 0402L 3228.8,4133.28 r90 bottom
FL3 "BLM15PD300SZ1D" 0402L 6159,3836 r270 top
FL6 "BLM15PD300SZ1D" 0402L 3153.46,4388.19 r180 top
FL7 "BLM15PD300SZ1D" 0402L 3835,4188.31 r90 bottom
FL8 "BLM15PD300SZ1D" 0402L 4170.37,4339.04 r180 bottom
FL9 "BLM15PD300SZ1D" 0402L 3881.31,4271 r180 bottom
FL10 "BLM15PD300SZ1D" 0402L 3978.37,3984.87 r0 bottom
FL11 "BLM15PD300SZ1D" 0402L 4674.94,3755.5 r180 top locked
FL12 "BLM15PD300SZ1D" 0402L 5450.1,4210.46 r180 bottom
FL14 "BLM15PD300SZ1D" 0402L 6330,4105.18 r180 top
FL20 "BLM15PD300SZ1D" 0402L 3552.13,4385.05 r180 top
FL22 "BLM15PD300SZ1D" 0402L 4843.47,3842.73 r270 top locked
J1 "105017-0001" CONN_105017-0001 3119.51,4164.78 r90 bottom
J2 "QSH-030-01-L-D-A" Samtec_QSH-030-01-X-D-A 4733.36,4144.5 r0 bottom locked
J3 "M50-3930442" FP-M50-3930442_HDR4-RECOMMENDED_LAND_PATTERN 5065.29,4581.75 r0 bottom
J4 "51441-1093" FP-51441-1093_CONN_SMD_FFC-0 4585.45,4173.34 r270 top locked
J5 "105017-0001" CONN_105017-0001 6486.85,4155.73 r90 top
J6 "51441-1093" FP-51441-1093_CONN_SMD_FFC-0 5633.17,3775.17 r0 top
J7 "GRPB052MWCN-RC" FP-GRPB052MWCN-RC_HDR10-MFG 5736.47,4571.46 r0 bottom
J8 "M50-3930342" FP-M50-3930342_HDR3-MFG 5459.37,4574.83 r0 bottom
J9 "U.FL-R-SMT-1(01)" CONN_UFL-R-SMT-1 5232.96,4283.6 r90 top
J10 "M50-3930342" FP-M50-3930342_HDR3-MFG 6582.37,3800 r90 top
L1 "LQG15HS2N4S02D" IND_LQG15H 5975.41,4324.41 r0 top
L2 "MCKK2012TR47M" "FP-MCKK2012TR47M_0805 (2012 Metric)-IPC_C" 3480.98,4358.44 r270 top
L3 "MCKK2012TR47M" "FP-MCKK2012TR47M_0805 (2012 Metric)-IPC_C" 3346.24,4358.44 r270 top
L4 "MCKK2012TR47M" "FP-MCKK2012TR47M_0805 (2012 Metric)-IPC_C" 3480.98,3957.6 r90 top
L5 "MCKK2012TR47M" "FP-MCKK2012TR47M_0805 (2012 Metric)-IPC_C" 3344.24,3957.6 r90 top
L6 "LQG15HS2N4S02D" IND_LQG15H 5903.37,4396.46 r90 top
L7 "MLZ2012N6R8LT000" 0805_HV 5980.15,4040.83 r90 bottom
L8 "BLM18HE152SN1D" 0603L 6040.76,3919.1 r90 top
L9 "LQG15HS2N0S02D" IND_LQG15H 5930.04,4485.35 r90 top
L10 "LQG15HS2N0S02D" IND_LQG15H 6085.98,4550.46 r0 top
L11 "BLM18SG260TN1D" 0603L 3892.39,4015.02 r0 bottom
L12 "BLM18SG260TN1D" 0603L 4090.19,4281.1 r180 bottom
L13 "BLM18SG260TN1D" 0603L 3242.64,4385.23 r180 top
L14 "BLM18SG260TN1D" 0603L 4121.43,4229.06 r180 bottom
LD1 "APHHS1005CGCK" APHHS1005_Green 3121.65,4188.5 r0 top
LD2 "APHHS1005CGCK" APHHS1005_Green 4607.12,4561.07 r180 top locked